# Allegro board AX7103-2021-0629.brd
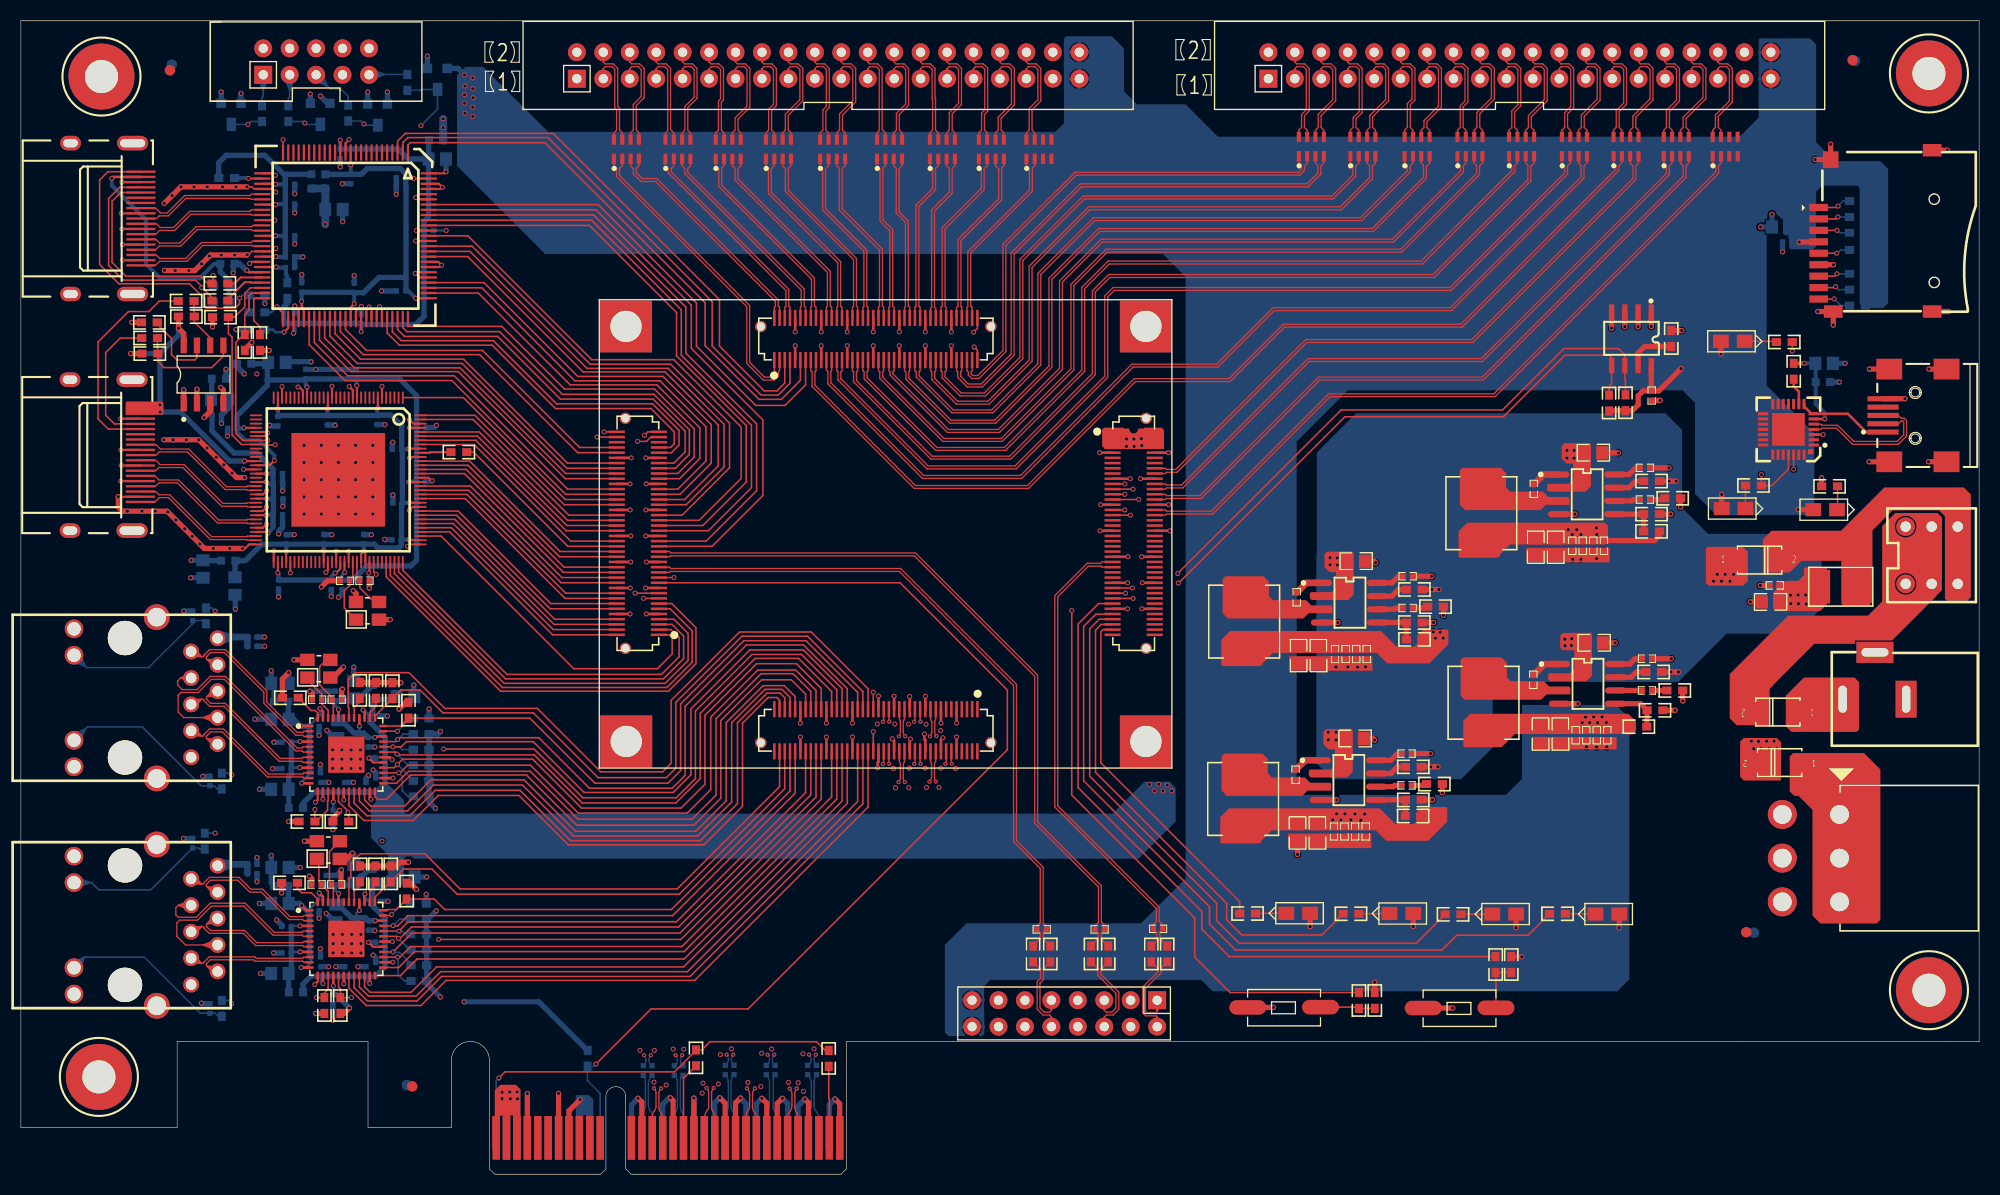
[diagram p0: board, top side]
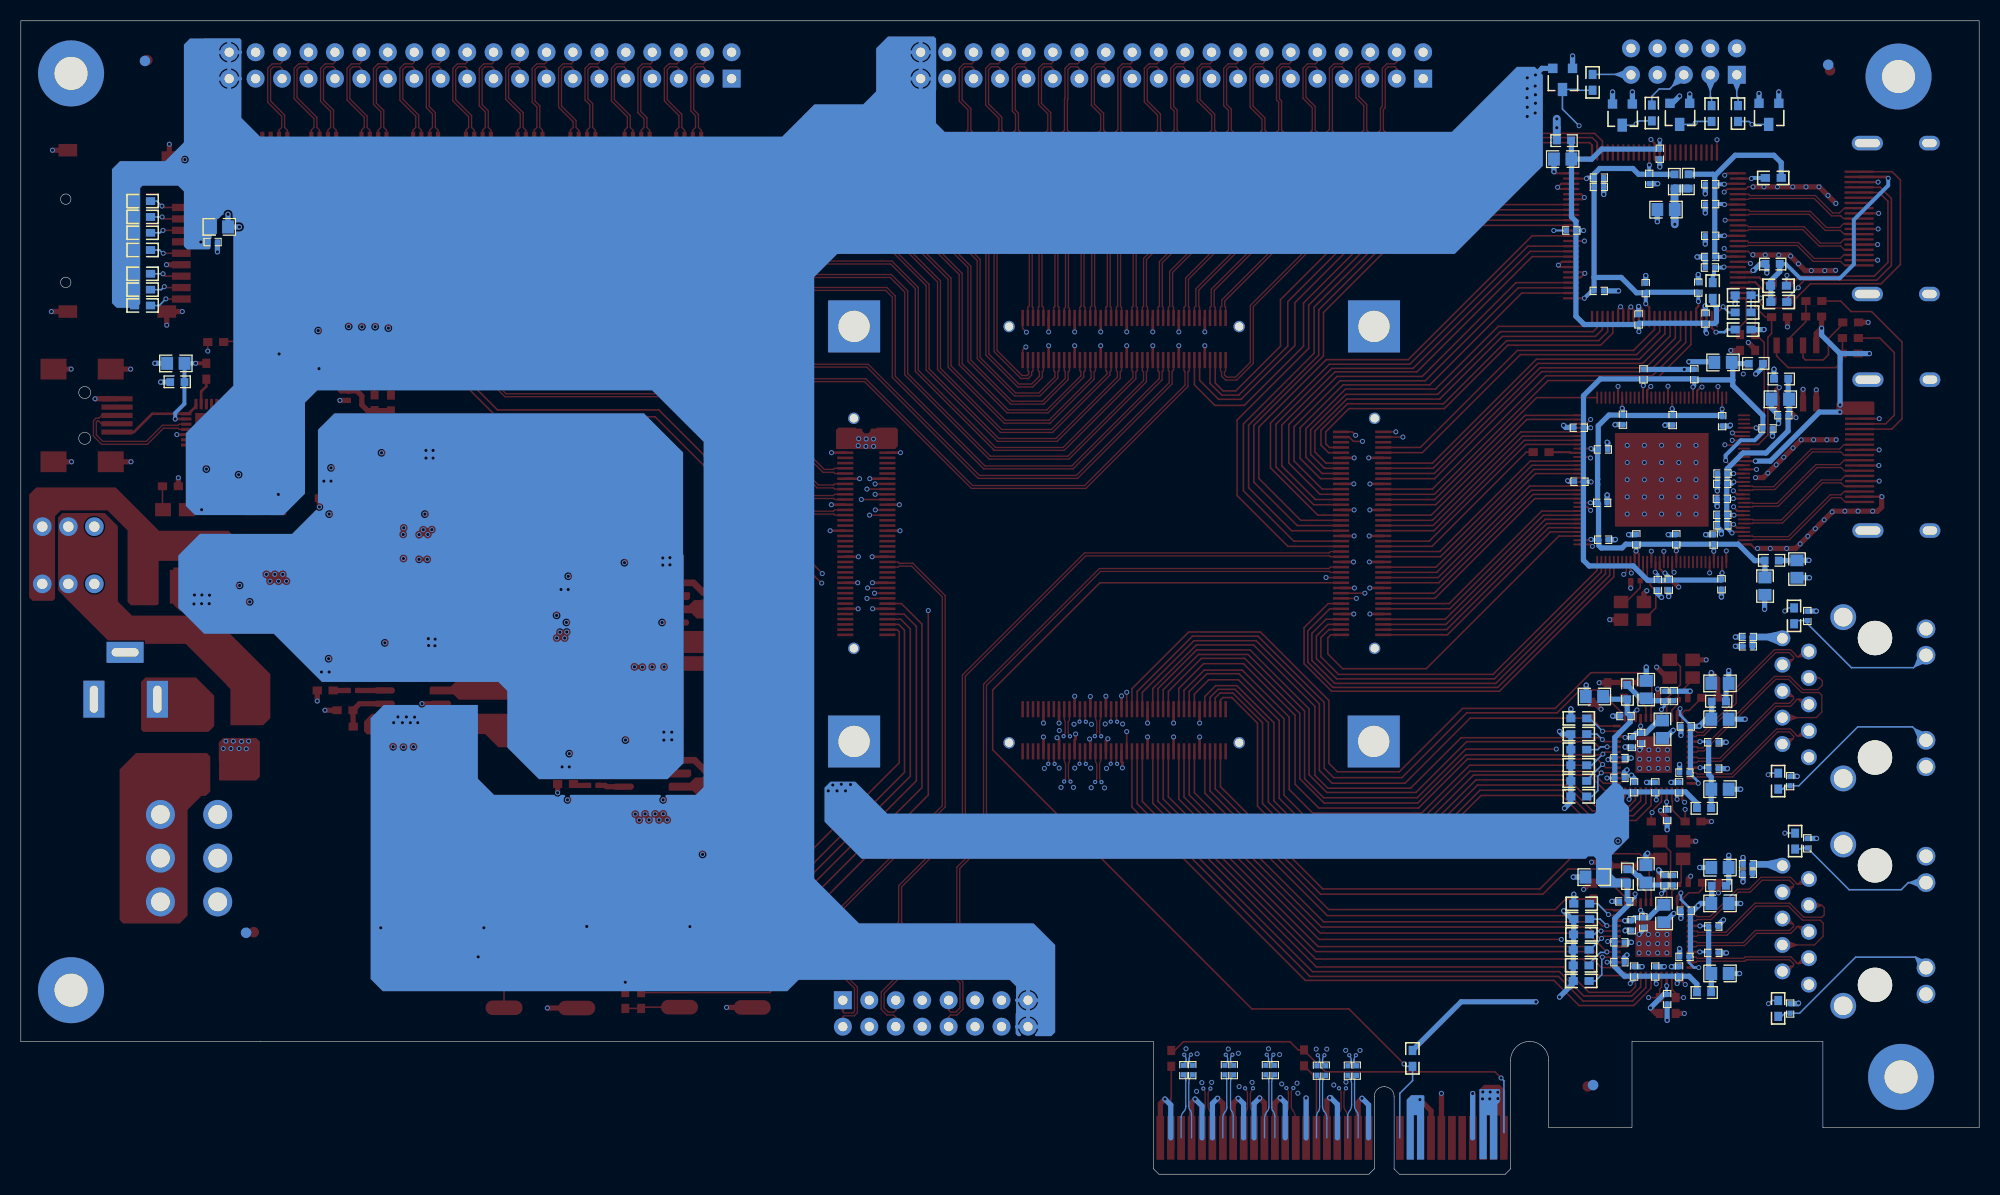
[diagram p1: board, bottom side, seen from below]

Outline 188.1 x 110.82 mm; copper layers: TOP, SGND, IN1, IN2, SGND1, BOTTOM. Coordinates in mm from the lower left corner of the outline.
Outline path: circle c181.96,75.1 r0.58 ; circle c181.96,70.7 r0.58 ; circle c183.78,93.68 r0.5 ; circle c183.78,85.68 r0.5 ; 0,110.82 0,4.5 15.01,4.5 15.01,12.75 33.35,12.75 33.35,4.5 41.35,4.5 41.35,10.92 arc(41.89,12.22) 43.18,12.75 arc(44.47,12.22) 45.01,10.92 45.01,0.51 45.52,0 55.69,0 56.2,0.51 56.2,7.47 arc(56.47,8.13) 57.14,8.41 57.16,8.41 arc(57.83,8.13) 58.1,7.47 58.1,0.51 58.61,0 78.79,0 79.3,0.51 79.3,12.73 188.1,12.73 188.1,110.82 0,110.82

## Design rules (mm)
net group EX_IO1_2P: nets EX_IO1_2N EX_IO1_2P
net group EX_IO1_4P: nets EX_IO1_4N EX_IO1_4P
net group EX_IO1_13P: nets EX_IO1_13N EX_IO1_13P
net group EX_IO1_14P: nets EX_IO1_14N EX_IO1_14P
net group EX_IO2_15N: nets EX_IO2_15N IO2_15N
net group EX_IO2_15P: nets EX_IO2_15P IO2_15P
net group EX_IO2_16N: nets EX_IO2_16N IO2_16N
net group EX_IO2_16P: nets EX_IO2_16P IO2_16P
net group IO1_4N: nets IO1_4N IO1_4P
net group IO1_13P: nets IO1_13N IO1_13P
net group IO1_14P: nets IO1_14N IO1_14P
net group N16786323: nets N16786264 N16786323
net group PCIE_CLK_N: nets N17087016 PCIE_CLK_N
net group PCIE_CLK_P: nets N17087018 PCIE_CLK_P
net group PCIE_TX0_N: nets N17086969 PCIE_TX0_N
net group PCIE_TX0_P: nets N17086971 PCIE_TX0_P
net group PCIE_TX1_N: nets N17086973 PCIE_TX1_N
net group PCIE_TX1_P: nets N17086975 PCIE_TX1_P
net group PCIE_TX2_N: nets N17086977 PCIE_TX2_N
net group PCIE_TX2_P: nets N17086979 PCIE_TX2_P
net group PCIE_TX3_N: nets N17086981 PCIE_TX3_N
net group PCIE_TX3_P: nets N17086983 PCIE_TX3_P
net group PHY_MDI0_N: nets PHY1_MDI0_P PHY2_MDI0_P
net group HDMI: nets RX_0N RX_0P RX_1N RX_1P RX_2N RX_2P RX_CN RX_CP TX_0N TX_0P TX_1N TX_1P TX_2N TX_2P TX_CN TX_CP
net group J11-DIFF: nets EX_IO1_1N EX_IO1_1P EX_IO1_3N EX_IO1_3P EX_IO1_5N EX_IO1_5P EX_IO1_6N EX_IO1_6P EX_IO1_7N EX_IO1_7P EX_IO1_8N EX_IO1_8P EX_IO1_9N EX_IO1_9P EX_IO1_10N EX_IO1_10P EX_IO1_11N EX_IO1_11P EX_IO1_12N EX_IO1_12P EX_IO1_15N EX_IO1_15P EX_IO1_16N EX_IO1_16P EX_IO1_17N EX_IO1_17P IO1_1N IO1_1P IO1_2N IO1_2P IO1_3N IO1_3P IO1_5N IO1_5P IO1_6N IO1_6P IO1_7N IO1_7P IO1_8N IO1_8P IO1_9N IO1_9P IO1_10N IO1_10P IO1_11N IO1_11P IO1_12N IO1_12P IO1_15N IO1_15P IO1_16N IO1_16P IO1_17N IO1_17P
net group J13-DIFF: nets EX_IO2_1N EX_IO2_1P EX_IO2_2N EX_IO2_2P EX_IO2_3N EX_IO2_3P EX_IO2_4N EX_IO2_4P EX_IO2_5N EX_IO2_5P EX_IO2_6N EX_IO2_6P EX_IO2_7N EX_IO2_7P EX_IO2_8N EX_IO2_8P EX_IO2_9N EX_IO2_9P EX_IO2_10N EX_IO2_10P EX_IO2_11N EX_IO2_11P EX_IO2_12N EX_IO2_12P EX_IO2_13N EX_IO2_13P EX_IO2_14N EX_IO2_14P EX_IO2_17N EX_IO2_17P IO2_1N IO2_1P IO2_2N IO2_2P IO2_3N IO2_3P IO2_4N IO2_4P IO2_5N IO2_5P IO2_6N IO2_6P IO2_7N IO2_7P IO2_8N IO2_8P IO2_9N IO2_9P IO2_10N IO2_10P IO2_11N IO2_11P IO2_12N IO2_12P IO2_13N IO2_13P IO2_14N IO2_14P IO2_17N IO2_17P
net group P1-DIFF: nets PCIE_RX0_N PCIE_RX0_P PCIE_RX1_N PCIE_RX1_P PCIE_RX2_N PCIE_RX2_P PCIE_RX3_N PCIE_RX3_P
net group PHY_MDI: nets PHY1_MDI0_N PHY1_MDI1_N PHY1_MDI1_P PHY1_MDI2_N PHY1_MDI2_P PHY1_MDI3_N PHY1_MDI3_P PHY2_MDI0_N PHY2_MDI1_N PHY2_MDI1_P PHY2_MDI2_N PHY2_MDI2_P PHY2_MDI3_N PHY2_MDI3_P
net group XADC-DIFF: nets XADC_AD0N XADC_AD0N_C XADC_AD0P XADC_AD0P_C XADC_AD9N XADC_AD9N_C XADC_AD9P XADC_AD9P_C XADC_VN XADC_VN_C XADC_VP XADC_VP_C

## Placement (name value [footprint] x y rotation side)
C61  10uF  [C0805]  40.01 97.54 0 bottom
C62  0.1uF  [C0402]  32.71 82.13 90 bottom
C63  0.1uF  [C0402]  30.68 98.03 270 bottom
C64  0.1uF  [C0402]  26.29 82.22 90 bottom
C65  0.1uF  [C0402]  26.98 85.19 90 bottom
C66  0.1uF  [C0402]  31.69 95.62 270 bottom
C67  0.1uF  [C0402]  32.02 85.14 90 bottom
C68  0.1uF  [C0402]  36.52 94.86 180 bottom
C69  0.1uF  [C0402]  36.52 95.75 180 bottom
C70  0.1uF  [C0402]  36.53 84.86 180 bottom
C71  0.1uF  [C0402]  25.85 87.11 180 bottom
C72  0.1uF  [C0402]  25.85 95.11 0 bottom
C73  0.1uF  [C0402]  25.85 88.13 0 bottom
C74  0.1uF  [C0402]  25.85 90.16 0 bottom
C75  0.1uF  [C0402]  25.85 93.21 0 bottom
C76  10uF  [C0805]  30.07 92.68 0 bottom
C77  0.1uF  [C0402]  39.19 90.67 0 bottom
C78  0.1uF  [C0402]  156.64 74.8 270 top
C79  10uF  [C0805]  169.04 91.01 180 bottom
C80  0.1uF  [C0402]  169.67 89.56 180 bottom
C81  1000pF  [C0402]  109.22 23.57 180 top
C82  1000pF  [C0402]  98.04 23.52 180 top
C84  1000pF  [C0402]  103.63 23.52 0 top
C109  0.1uF  [C0402]  62.76 9.96 90 bottom
C110  0.1uF  [C0402]  63.6 9.96 90 bottom
C111  0.1uF  [C0402]  59.79 9.96 90 bottom
C112  0.1uF  [C0402]  60.63 9.96 90 bottom
C113  0.1uF  [C0402]  72.44 10.01 90 bottom
C114  0.1uF  [C0402]  71.6 10.01 90 bottom
C115  0.1uF  [C0402]  68.5 10.01 90 bottom
C116  0.1uF  [C0402]  67.67 10.01 90 bottom
C129  1uF  [C0603]  173.07 76.11 0 bottom
C130  10uF  [C0805]  173.21 77.91 0 bottom
C133  10uF/25V  [C0805]  168.07 54.99 180 top
C134  0.1uF/25V  [C0402]  168.45 56.57 180 top
C135  0.01uF  [C0402]  145.33 65.83 270 top
C136  10uF/25V  [C0805]  151.04 69.31 0 top
C137  0.1uF  [C0402]  156 67.86 0 top
C138  10uF  [C0805]  145.51 60.24 270 top
C139  10uF  [C0805]  147.41 60.24 270 top
C140  0.1uF  [C0402]  152.06 60.37 270 top
C141  0.1uF  [C0402]  151.04 60.37 270 top
C142  0.1uF  [C0402]  150.03 60.37 270 top
C143  0.1uF  [C0402]  149.01 60.37 270 top
C144  33nF  [C0402]  156 64.81 0 top
C145  0.01uF  [C0402]  145.28 47.49 270 top
C146  10uF/25V  [C0805]  151.12 51.05 0 top
C147  10uF  [C0805]  145.96 42.29 270 top
C148  10uF  [C0805]  147.87 42.29 270 top
C149  0.1uF  [C0402]  152.39 42.16 270 top
C150  0.1uF  [C0402]  151.37 42.16 270 top
C151  0.1uF  [C0402]  150.36 42.16 270 top
C152  0.1uF  [C0402]  149.34 42.16 270 top
C153  0.1uF  [C0402]  156.2 49.52 0 top
C154  33nF  [C0402]  156.2 46.48 0 top
C155  0.1uF  [C0402]  76.43 10.01 90 bottom
C156  0.1uF  [C0402]  75.59 10.01 90 bottom
C157  0.1uF  [C0402]  18.82 72.93 0 bottom
C158  0.1uF  [C0402]  24.7 66.32 0 bottom
C159  0.1uF  [C0402]  24.68 63.35 0 bottom
C160  0.1uF  [C0402]  24.68 62.35 0 bottom
C161  0.1uF  [C0402]  24.67 67.31 0 bottom
C162  0.1uF  [C0402]  24.73 64.88 0 bottom
C163  0.1uF  [C0402]  25.5 60.99 90 bottom
C164  0.1uF  [C0402]  36.11 60.96 180 bottom
C165  0.1uF  [C0402]  29.44 72.44 270 bottom
C166  0.1uF  [C0402]  32.93 61.01 90 bottom
C167  0.1uF  [C0402]  36.13 69.63 180 bottom
C168  0.1uF  [C0402]  36.2 64.5 180 bottom
C169  0.1uF  [C0402]  34.21 72.48 270 bottom
C170  0.1uF  [C0402]  24.69 72.34 270 bottom
C171  0.1uF  [C0402]  29.1 61.01 90 bottom
C172  0.1uF  [C0402]  38.47 71.72 0 bottom
C173  0.1uF  [C0402]  29.82 56.63 270 bottom
C174  0.1uF  [C0402]  27.37 76.87 90 bottom
C175  0.1uF  [C0402]  24.75 56.67 270 bottom
C176  0.1uF  [C0402]  32.25 76.86 90 bottom
C177  0.1uF  [C0402]  30.86 56.6 270 bottom
C178  0.1uF  [C0402]  38.4 66.54 0 bottom
C179  0.1uF  [C0402]  20.32 71.65 180 bottom
C180  18pF  [C0402]  33.02 57.02 0 top
C181  18pF  [C0402]  31.13 57.01 180 top
C182  10uF  [C0805]  17.5 58.14 270 bottom
C183  10uF  [C0805]  19.1 74.46 0 bottom
C184  10uF  [C0805]  24.6 78 0 bottom
C185  10uF  [C0805]  20.57 56.5 270 bottom
C186  18pF  [C0402]  30.35 45.59 0 top
C187  18pF  [C0402]  28.45 45.59 180 top
C188  0.1uF  [C0402]  18.16 37.77 90 bottom
C189  0.1uF  [C0402]  16.51 53.64 90 bottom
C190  0.1uF  [C0402]  22.23 50.72 0 bottom
C191  0.1uF  [C0402]  22.23 51.61 0 bottom
C192  22uF  [C0805]  30.43 42.75 270 bottom
C193  0.1uF  [C0402]  32.46 41.91 270 bottom
C194  0.1uF  [C0402]  33.35 41.5 270 bottom
C195  0.1uF  [C0402]  29.97 34.52 270 bottom
C196  0.1uF  [C0402]  18.16 15.93 90 bottom
C197  22uF  [C0805]  24.89 47.17 0 bottom
C198  22uF  [C0805]  24.89 43.71 180 bottom
C199  0.1uF  [C0402]  22.23 28.88 0 bottom
C200  0.1uF  [C0402]  16.51 31.8 90 bottom
C201  0.1uF  [C0402]  22.23 29.77 0 bottom
C202  22uF  [C0805]  24.89 29.46 0 bottom
C203  22uF  [C0805]  24.89 26.01 180 bottom
C204  22uF  [C0805]  30.28 25.04 270 bottom
C205  0.1uF  [C0402]  29.97 16.81 270 bottom
C206  0.1uF  [C0402]  32.26 24.18 270 bottom
C207  0.1uF  [C0402]  28.32 38.58 0 bottom
C208  0.1uF  [C0402]  28.19 43.03 0 bottom
C209  0.1uF  [C0402]  28.32 20.88 0 bottom
C210  22uF  [C0805]  36.96 45.9 0 bottom
C211  22uF  [C0805]  24.89 36.98 180 bottom
C213  22uF  [C0805]  31.98 46.56 90 bottom
C214  0.1uF  [C0402]  28.19 25.32 0 bottom
C215  22uF  [C0805]  24.89 19.28 180 bottom
C216  22uF  [C0805]  32 28.85 90 bottom
C217  0.1uF  [C0402]  33.38 23.9 270 bottom
C218  22uF  [C0805]  36.98 28.55 0 bottom
C219  18pF  [C0402]  30.3 27.84 0 top
C220  18pF  [C0402]  28.4 27.84 180 top
C223  10uF  [C0805]  122.72 49.83 270 top
C224  10uF  [C0805]  124.63 49.83 270 top
C225  10uF/25V  [C0805]  128.26 58.9 0 top
C226  0.1uF  [C0402]  127.24 49.96 270 top
C227  0.1uF  [C0402]  126.23 49.96 270 top
C228  0.1uF  [C0402]  128.26 49.96 270 top
C229  0.1uF  [C0402]  129.27 49.96 270 top
C230  0.01uF  [C0402]  122.54 55.42 270 top
C231  0.1uF  [C0402]  133.21 57.45 0 top
C232  33nF  [C0402]  133.21 54.4 0 top
C233  10uF  [C0805]  122.62 32.79 270 top
C234  10uF  [C0805]  124.53 32.79 270 top
C235  10uF/25V  [C0805]  128.16 41.85 0 top
C236  0.1uF  [C0402]  128.16 32.91 270 top
C237  0.1uF  [C0402]  129.17 32.91 270 top
C238  0.1uF  [C0402]  127.14 32.91 270 top
C239  0.1uF  [C0402]  126.13 32.91 270 top
C240  0.1uF  [C0402]  133.11 40.41 0 top
C241  0.01uF  [C0402]  122.44 38.37 270 top
C242  0.1uF  [C0402]  31.11 37.19 90 bottom
C243  33nF  [C0402]  133.11 37.36 0 top
C244  0.1uF  [C0402]  28.83 19.48 90 bottom
C245  0.1uF  [C0402]  25.53 38.96 180 bottom
C246  0.1uF  [C0402]  28.83 37.19 90 bottom
C247  0.1uF  [C0402]  33.15 37.19 90 bottom
C248  0.1uF  [C0402]  33.99 44.02 0 bottom
C249  0.1uF  [C0402]  34.54 39.98 180 bottom
C250  0.1uF  [C0402]  34.54 38.07 180 bottom
C251  0.1uF  [C0402]  25.53 41.5 180 bottom
C252  0.01uF  [C0402]  29.34 45.95 90 bottom
C253  0.1uF  [C0402]  30.23 45.95 90 bottom
C259  0.1uF  [C0402]  25.53 23.8 180 bottom
C260  0.1uF  [C0402]  25.53 21.26 180 bottom
C261  0.1uF  [C0402]  30.23 28.24 90 bottom
C262  0.01uF  [C0402]  29.34 28.24 90 bottom
C263  0.1uF  [C0402]  31.11 19.48 90 bottom
C264  0.1uF  [C0402]  33.15 19.48 90 bottom
C265  0.1uF  [C0402]  34.54 22.28 180 bottom
C266  0.1uF  [C0402]  34.54 20.37 180 bottom
C267  0.1uF  [C0402]  34.09 26.21 0 bottom
CN1  AJ243-3-3C  [CN1-DCJACK]  181.08 45.64 90 top
CON1  -  [AXK680337YG]  106.89 61.57 270 top
CON2  -  [AXK680337YG]  82.13 80.24 0 top
CON3  -  [AXK680337YG]  59.27 61.57 90 top
CON4  -  [AXK680337YG]  82.13 42.65 180 top
D1  BAT54S  [SOT23]  19.24 102.89 0 bottom
D2  BAT54S  [SOT23]  27.8 102.89 0 bottom
D3  BAT54S  [SOT23]  33.31 102.82 0 bottom
D4  BAT54S  [SOT23]  39.06 106.25 0 bottom
D23  B340A  [DO-214AC]  168.76 44.4 180 top
D24  B340A  [DO-214AC]  168.94 39.55 180 top
D25  B340A  [DO-214AC]  167 59 0 top
F1  2A  [FUSE_1812]  174.8 56.44 180 top
F2  SMD0603P014TF-33  [L0603]  19.84 87.47 180 bottom
J3  HR911130A  [GE_RJ45]  10.01 51.51 180 top
J4  HR911130A  [GE_RJ45]  10.01 29.67 180 top
J7  Micro SD  [MICRO_SD]  172.68 92.88 90 top
J9  HEADER 5X2  [JTAG-10]  23.28 105.63 0 top
J10  MINI_USB  [MINIUSBB]  178.86 72.9 180 top
J11  HEADER 20x2/M  [IDC-40J]  143.96 106.53 0 top
J12  HDMI OUT  [HDMI_A_TYPE]  12.69 99.32 0 top
J13  HEADER 20x2/M  [IDC-40J]  77.54 106.53 0 top
J14  39-30-1060  [CON_MOL_5569_6P]  174.69 34.56 0 top
J15  HDMI IN  [HDMI_A_TYPE]  12.64 76.59 0 top
J18  CON16A  [IDC16-DTM1-A]  100.2 15.39 180 top
KEY1  Button  [KEY735SO]  124.83 16.05 180 top
KEY2  Button  [KEY735SO]  141.69 15.99 180 top
L3  120OHM@100Mhz  [L0603]  25.01 45.42 0 bottom
L4  120OHM@100Mhz  [L0603]  26.43 35.18 180 bottom
L5  120OHM@100Mhz  [L0603]  33.81 46.32 90 bottom
L6  120OHM@100Mhz  [L0603]  25.01 27.71 0 bottom
L7  BEAD  [L0603]  39.88 99.33 180 bottom
L8  BEAD  [L0603]  29.25 95.38 270 bottom
L9  120OHM@100Mhz  [L0603]  26.43 17.48 180 bottom
L10  120OHM@100Mhz  [L0603]  33.81 28.61 90 bottom
L13  10uH  [SMTDR75-100M]  140.29 63.51 270 top
L14  10uH  [SMTDR75-100M]  140.49 45.3 270 top
L15  BEAD  [L0603]  27.91 95.39 270 bottom
L16  BEAD  [L0603]  21.45 77.88 0 bottom
L17  BEAD  [L0603]  19.93 58.95 0 bottom
L18  BEAD  [L0603]  19.02 76.43 180 bottom
L19  10uH  [SMTDR75-100M]  117.5 53.09 270 top
L20  10uH  [SMTDR75-100M]  117.4 36.05 270 top
LED1  RED  [LEDSO]  121.55 25.07 0 top
LED2  RED  [LEDSO]  131.46 25.04 0 top
LED3  RED  [LEDSO]  165.58 80.02 180 top
LED4  RED  [LEDSO]  165.65 63.95 180 top
LED5  RED  [LEDSO]  174.44 63.85 180 top
LED6  RED  [LEDSO]  141.34 24.99 0 top
LED7  RED  [LEDSO]  151.24 24.99 0 top
NOREF  -  [unnamed]  58.15 41.58 0 top
NOREF#2  -  [unnamed]  108.06 41.58 0 top
NOREF#3  -  [#2]  302.27 53.99 0 top
NOREF#4  -  [#2]  0.15 4.5 90 top
NOREF#5  -  [#2]  0.1 108.56 0 top
NOREF#6  -  [unnamed]  58.13 81.46 0 top
NOREF#7  -  [unnamed]  108.06 81.46 0 top
NOREF#8  -  [unnamed#2]  14.32 106.06 0 top
NOREF#9  -  [unnamed#2]  175.95 107.04 0 top
NOREF#10  -  [unnamed#2]  37.59 8.43 0 top
NOREF#11  -  [unnamed#2]  165.73 23.25 0 top
NOREF#12  -  [unnamed#2]  176.17 106.96 180 bottom
NOREF#13  -  [unnamed#2]  14.5 106.6 180 bottom
NOREF#14  -  [unnamed#2]  37.08 8.56 180 bottom
NOREF#15  -  [unnamed#2]  166.46 23.2 180 bottom
P1  PCIeX4  [PCIE_4LANE_EDGE]  45.65 3.49 0 top
R51  0R  [R0603]  158.52 80.29 90 top
R52  0R  [R0603]  25.59 84.9 270 bottom
R53  33R  [R0603]  19.12 85.58 180 top
R54  33R  [R0603]  19.12 83.93 180 top
R55  10K  [R0603]  22.68 81.15 180 bottom
R56  33R  [R0603]  22.68 82.8 180 bottom
R57  10K  [R0603]  22.97 79.91 270 top
R58  698R  [R0603]  19.78 95.72 180 bottom
R59  10K  [R0603]  22.68 84.44 0 bottom
R60  10K  [R0603]  19.27 85.36 0 bottom
R61  10K  [R0603]  19.25 83.8 0 bottom
R62  4.7K  [R0603]  19.18 82.34 180 top
R63  4.7K  [R0603]  21.52 79.91 270 top
R64  4.7K  [R0603]  154.12 74.12 90 top
R65  4.7K  [R0603]  152.55 74.09 90 top
R66  330R  [R0603]  19.3 37.77 270 bottom
R67  1.5K  [R0603]  37.23 44.58 90 top
R68  1.5K  [R0603]  35.68 46.46 90 top
R69  4.7K  [R0603]  34.12 46.48 270 top
R70  12.1K 1%  [R0603]  25.88 45.77 0 top
R71  330R  [R0603]  17.78 53.64 270 bottom
R72  4.7K  [R0603]  32.56 46.48 90 top
R73  4.7K  [R0603]  38.46 36.29 0 bottom
R74  4.7K  [R0603]  38.46 37.79 0 bottom
R75  4.7K  [R0603]  38.46 40.79 0 bottom
R76  4.7K  [R0603]  38.46 39.29 0 bottom
R77  4.7K  [R0603]  30.73 33.88 180 top
R78  1K  [R0603]  38.46 43.79 180 bottom
R79  1K  [R0603]  27.48 33.89 0 top
R80  4.7K  [R0603]  38.46 42.29 0 bottom
R81  1.5K  [R0603]  35.53 28.85 90 top
R82  4.7K  [R0603]  34.06 28.85 270 top
R83  12.1K 1%  [R0603]  25.81 27.99 0 top
R84  330R  [R0603]  19.3 15.93 270 bottom
R85  330R  [R0603]  17.67 32 270 bottom
R86  4.7K  [R0603]  32.58 28.85 90 top
R87  4.7K  [R0603]  38.23 20.06 0 bottom
R88  4.7K  [R0603]  38.23 18.56 0 bottom
R89  4.7K  [R0603]  38.23 21.56 0 bottom
R90  4.7K  [R0603]  38.2 23.03 0 bottom
R91  4.7K  [R0603]  30.69 16.21 270 top
R92  1K  [R0603]  38.18 25.99 180 bottom
R93  1K  [R0603]  29.16 16.21 90 top
R94  4.7K  [R0603]  38.18 24.51 0 bottom
R95  1.5K  [R0603]  37.06 27.2 90 top
R101  0R  [R0603]  64.85 11.18 270 top
R102  0R  [R0603]  77.6 11.13 270 top
R103  4.7K  [R0603]  54.43 11.13 270 bottom
R104  10K  [R0603]  176.4 83.46 0 bottom
R105  10K  [R0603]  176.4 86.51 0 bottom
R106  10K  [R0603]  176.4 91.97 0 bottom
R107  10K  [R0603]  176.4 93.49 0 bottom
R108  33R  [R0603]  15.88 83.89 180 top
R109  33R  [R0603]  12.37 80.34 180 top
R110  4.7K  [R0603]  12.4 78.85 0 top
R111  10K  [R0603]  176.4 90.45 0 bottom
R112  10K  [R0603]  176.4 84.98 0 bottom
R113  10K  [R0603]  176.4 88.79 0 bottom
R121  33R  [R0603]  23.16 101.9 270 bottom
R122  33R  [R0603]  25.7 101.9 270 bottom
R123  33R  [R0603]  31.44 101.96 270 bottom
R124  33R  [R0603]  37.13 104.9 270 bottom
R125  10K  [R0603]  170.28 77.15 90 top
R126  510R  [R0603]  169.38 79.95 180 top
R127  510R  [R0603]  166.42 66.17 180 top
R131  10K  [R0603]  130.04 16.69 90 top
R133  1K  [R0603]  128.52 16.69 90 top
R134  220R  [R0603]  127.76 25.02 0 top
R135  220R  [R0603]  117.83 25.05 0 top
R136  220R  [R0603]  173.73 66.09 0 top
R137  33R  [R0603]  42.08 69.38 180 top
R138  47K  [R0603]  156.63 66.59 180 top
R139  47K  [R0603]  156.63 61.76 180 top
R140  10K/1%  [R0603]  156.63 63.42 0 top
R141  2.2K  [R0603]  158.66 64.95 0 top
R142  47K  [R0603]  156.83 48.25 180 top
R143  26.1K/1%  [R0603]  155.41 43 0 top
R144  10K/1%  [R0603]  156.96 44.57 0 top
R145  2.2K  [R0603]  158.87 46.48 0 top
R146  4.7K  [R0603]  15.9 82.4 0 top
R147  10K  [R0603]  12.34 81.84 0 top
R148  49.9  [R0603]  110.11 21.16 90 top
R149  49.9  [R0603]  108.58 21.16 90 top
R150  49.9  [R0603]  98.88 21.16 90 top
R151  49.9  [R0603]  97.23 21.16 90 top
R152  220R  [R0603]  137.57 24.97 0 top
R153  220R  [R0603]  147.6 25.02 0 top
R154  49.9  [R0603]  102.79 21.16 90 top
R155  49.9  [R0603]  104.44 21.16 90 top
R156  2.2K  [R0603]  135.88 54.53 0 top
R157  47K  [R0603]  133.85 56.18 180 top
R158  1K  [R0603]  141.65 20.14 90 top
R159  10K  [R0603]  143.15 20.14 90 top
R160  9.53K/1%  [R0603]  133.86 51.38 180 top
R161  10K/1%  [R0603]  133.85 53.01 0 top
R162  2.2K  [R0603]  135.78 37.49 0 top
R163  47K  [R0603]  133.75 39.13 180 top
R164  3.09K/1%  [R0603]  133.73 34.41 180 top
R165  10K/1%  [R0603]  133.75 35.96 0 top
RN1  33R  [RN-8P]  122.75 97.8 90 top
RN2  33R  [RN-8P]  127.71 97.8 90 top
RN3  33R  [RN-8P]  132.91 97.8 90 top
RN4  33R  [RN-8P]  137.99 97.8 90 top
RN5  33R  [RN-8P]  142.95 97.8 90 top
RN6  33R  [RN-8P]  148.03 97.8 90 top
RN7  33R  [RN-8P]  152.98 97.8 90 top
RN8  33R  [RN-8P]  157.8 97.8 90 top
RN9  33R  [RN-8P]  162.5 97.8 90 top
RN10  33R  [RN-8P]  56.97 97.55 90 top
RN11  33R  [RN-8P]  66.75 97.55 90 top
RN12  33R  [RN-8P]  71.57 97.55 90 top
RN13  33R  [RN-8P]  61.92 97.55 90 top
RN14  33R  [RN-8P]  76.78 97.55 90 top
RN15  33R  [RN-8P]  82.24 97.55 90 top
RN16  33R  [RN-8P]  87.32 97.55 90 top
RN17  33R  [RN-8P]  92.02 97.55 90 top
RN18  33R  [RN-8P]  96.59 97.55 90 top
S1  Screw_2.9  [MH_250H125]  183.27 17.68 0 top
S2  Screw_2.9  [MH_250H125]  183.27 105.76 0 top
S3  Screw_2.9  [MH_250H125]  7.75 105.46 0 top
S4  Screw_2.9  [MH_250H125]  7.5 9.35 0 top
SW1  Power Switch  [POWER_SW]  183.54 62.22 90 top
U2  KSZ9031RNX  [QFN_7X7]  31.27 40.31 270 top
U3  KSZ9031RNX  [QFN_7X7]  31.27 22.61 270 top
U5  CP2102-GM  [QFN-28]  169.78 71.56 180 top
U6  MP1482DS  [MP1482-SOIC8]  150.41 65.32 270 top
U7  MP1482DS  [MP1482-SOIC8]  150.48 47.11 270 top
U8  MP1482DS  [MP1482-SOIC8]  127.62 54.91 270 top
U9  24LC04  [8S1_SOIC8]  154.7 80.27 0 top
U10  SiI9134  [QFP-100]  31.19 90.16 270 top
U11  MP1482DS  [MP1482-SOIC8]  127.52 37.87 270 top
U13  SiI9013/9011  [QFP-128HPAD]  30.49 66.71 270 top
U14  24C02  [SO8]  15.65 74.04 90 top
Y2  25MHZ  [SX2-1205]  28.63 48.56 0 top
Y3  25MHZ  [SX2-1205]  29.54 31.14 0 top
Y4  27MHZ  [SX2-1205]  33.3 54.13 0 top

## Library data of the parts
C61 C76 C78-C82 C84 C129 C130 C133 C135-C139 C144-C148 C153 C154 C180-C187 C192-C195 C197 C198 C202-C211 C213-C220 C223-C225 C230-C235 C240-C253 C259-C267 = CAP NP
C62-C75 C77 C134 C140-C143 C149-C152 C157-C179 C226-C229 C236-C239 = C_1
C109-C116 C155 C156 = CAP NP: signal model: C0402
C188-C191 C196 C199-C201 = CAP_3
CN1 = AJ243_0
CON1 = CON40X2_0_0
CON2 = CON40X2_0_1
CON3 = CON40X2_0_2
CON4 = CON40X2_0_3
D1-D4 = SBL1645CT/TO_0
D23-D25 = BZX84C33/SOT_0
F1 = FUSE
F2 = FUSE/SM
J3 J4 = GE_RJ45_2
J7 = Micro SD_2
J9 = HEADER 5X2
J10 = USB_B_3
J11 J13 = HEADER 20x2/M
J12 J15 = HDMI Connector_0
J14 = 39-30-1060_2
J18 = CON16A
KEY1 KEY2 = Button_0
L3-L10 L13-L15 L19 L20 = INDUCTOR
L16-L18 = INDUCTOR_0
LED1-LED7 = LN211WP
P1 = PCIex4
R51 R65 R67-R70 R72-R83 R86-R95 R104-R107 R111-R113 R121-R127 R131 R133-R136 R138-R145 R152 R153 R156-R165 = RESISTOR
R52-R63 = R_0
R64 = RESISTOR: signal model: R_GENERIC_R0402_33R_33R
R66 R71 R84 R85 = R_2
R101-R103 R108-R110 R137 R146-R151 R154 R155 = R
RN1-RN16 RN18 = RESARR_IS_4/SM
RN17 = RESARR_IS_4/SM: signal model: RESARR_IS_4/SM_RN-8P_33R_33R
S1-S4 = screw_0
SW1 = SENS59150-SPST_1
U2 U3 = KS8995M_4
U5 = CP2102_2
U6-U8 U11 = MP2305
U9 = ATSHA204_0
U10 = SiI9134_0
U13 = SiI9013/9011_5
U14 = M24CO2 PDIP8
Y2-Y4 = X3_0

## Footprints (pads in the part's own frame, mm; a bottom-side part is the same pattern mirrored in y, then rotated)
8S1_SOIC8
  rect 0.518x1.458 smd: 1(1.905,2.58) 2(0.635,2.58) 3(-0.635,2.58) 4(-1.905,2.58) 5(-1.905,-2.58) 6(-0.635,-2.58) 7(0.635,-2.58) 8(1.905,-2.58)
AXK680337YG
  rect 0.25x1.55 smd: 1(-9.75,-2.025) 2(-9.75,2.025) 3(-9.25,-2.025) 4(-9.25,2.025) 5(-8.75,-2.025) 6(-8.75,2.025) 7(-8.25,-2.025) 8(-8.25,2.025) 9(-7.75,-2.025) 10(-7.75,2.025) 11(-7.25,-2.025) 12(-7.25,2.025) 13(-6.75,-2.025) 14(-6.75,2.025) 15(-6.25,-2.025) 16(-6.25,2.025) 17(-5.75,-2.025) 18(-5.75,2.025) 19(-5.25,-2.025) 20(-5.25,2.025) 21(-4.75,-2.025) 22(-4.75,2.025) 23(-4.25,-2.025) 24(-4.25,2.025) 25(-3.75,-2.025) 26(-3.75,2.025) 27(-3.25,-2.025) 28(-3.25,2.025) 29(-2.75,-2.025) 30(-2.75,2.025) 31(-2.25,-2.025) 32(-2.25,2.025) 33(-1.75,-2.025) 34(-1.75,2.025) 35(-1.25,-2.025) 36(-1.25,2.025) 37(-0.75,-2.025) 38(-0.75,2.025) 39(-0.25,-2.025) 40(-0.25,2.025) 41(0.25,-2.025) 42(0.25,2.025) 43(0.75,-2.025) 44(0.75,2.025) 45(1.25,-2.025) 46(1.25,2.025) 47(1.75,-2.025) 48(1.75,2.025) 49(2.25,-2.025) 50(2.25,2.025) 51(2.75,-2.025) 52(2.75,2.025) 53(3.25,-2.025) 54(3.25,2.025) 55(3.75,-2.025) 56(3.75,2.025) 57(4.25,-2.025) 58(4.25,2.025) 59(4.75,-2.025) 60(4.75,2.025) 61(5.25,-2.025) 62(5.25,2.025) 63(5.75,-2.025) 64(5.75,2.025) 65(6.25,-2.025) 66(6.25,2.025) 67(6.75,-2.025) 68(6.75,2.025) 69(7.25,-2.025) 70(7.25,2.025) 71(7.75,-2.025) 72(7.75,2.025) 73(8.25,-2.025) 74(8.25,2.025) 75(8.75,-2.025) 76(8.75,2.025) 77(9.25,-2.025) 78(9.25,2.025) 79(9.75,-2.025) 80(9.75,2.025)
  round 1.1 hole 0.8: 81(-11.05,1.2) 82(11.05,1.2)
C0402
  rect 0.508x0.508 smd: 1(-0.457,0) 2(0.457,0)
C0603
  rect 0.762x0.762 smd: 1(-0.686,0) 2(0.686,0)
C0805
  rect 1.143x1.27 smd: 1(-0.838,0) 2(0.838,0)
CN1-DCJACK
  rect 3.556x2.032 hole 2.6x0.8: 1(0,0) 3(0,6.1)
  rect 2.032x3.556 hole 0.8x2.6: 2(4.5,2.997)
CON_MOL_5569_6P
  round 2.794 hole 1.803: 1(0,0) 2(0,-4.2) 3(0,-8.4) 4(-5.5,0) 5(-5.5,-4.2) 6(-5.5,-8.4)
DO-214AC
  rect 1.6x1.676 smd: 1(-1.99,0) 2(1.99,0)
FUSE_1812
  rect 1.829x3.251 smd: 1(-1.93,0) 2(1.93,0)
GE_RJ45
  round 3.3 hole 3.3 unplated: (0,11.48) (0,0)
  round 1.8 hole 1.3: 11(4.9,-0.885) 12(4.9,1.655) 13(4.9,9.825) 14(4.9,12.365)
  round 2.489 hole 1.8: 15(-3.05,-2.01) 16(-3.05,13.49)
  round 1.524 hole 1.016: P1(-8.89,0.025) P2(-6.35,1.295) P3(-8.89,2.565) P4(-6.35,3.835) P5(-8.89,5.105) P6(-6.35,6.375) P7(-8.89,7.645) P8(-6.35,8.915) P9(-8.89,10.185) P10(-6.35,11.455)
HDMI_A_TYPE
  rect 2.8x0.229 smd: 1(-1.15,-12) 2(-1.15,-11.5) 3(-1.15,-11) 4(-1.15,-10.5) 5(-1.15,-10) 6(-1.15,-9.5) 7(-1.15,-9) 8(-1.15,-8.5) 9(-1.15,-8) 10(-1.15,-7.5) 11(-1.15,-7) 12(-1.15,-6.5) 13(-1.15,-6) 14(-1.15,-5.5) 15(-1.15,-5) 16(-1.15,-4.5) 17(-1.15,-4) 18(-1.15,-3.5) 19(-1.15,-3)
  oval 3x1.4 hole 2.4x0.8: 20(-1.95,-14.75) 21(-1.95,-0.25)
  oval 2x1.4 hole 1.4x0.8: 22(-7.91,-14.75) 23(-7.91,-0.25)
IDC16-DTM1-A
  rect 1.727x1.727 hole 0.889: 1(-8.941,-1.321)
  round 1.727 hole 0.889: 2(-8.941,1.219) 3(-6.401,-1.321) 4(-6.401,1.219) 5(-3.861,-1.321) 6(-3.861,1.219) 7(-1.321,-1.321) 8(-1.321,1.219) 9(1.219,-1.321) 10(1.219,1.219) 11(3.759,-1.321) 12(3.759,1.219) 13(6.299,-1.321) 14(6.299,1.219) 15(8.839,-1.321) 16(8.839,1.219)
IDC-40J
  rect 1.727x1.727 hole 0.889: 1(-24.13,-1.27)
  round 1.727 hole 0.889: 2(-24.13,1.27) 3(-21.59,-1.27) 4(-21.59,1.27) 5(-19.05,-1.27) 6(-19.05,1.27) 7(-16.51,-1.27) 8(-16.51,1.27) 9(-13.97,-1.27) 10(-13.97,1.27) 11(-11.43,-1.27) 12(-11.43,1.27) 13(-8.89,-1.27) 14(-8.89,1.27) 15(-6.35,-1.27) 16(-6.35,1.27) 17(-3.81,-1.27) 18(-3.81,1.27) 19(-1.27,-1.27) 20(-1.27,1.27) 21(1.27,-1.27) 22(1.27,1.27) 23(3.81,-1.27) 24(3.81,1.27) 25(6.35,-1.27) 26(6.35,1.27) 27(8.89,-1.27) 28(8.89,1.27) 29(11.43,-1.27) 30(11.43,1.27) 31(13.97,-1.27) 32(13.97,1.27) 33(16.51,-1.27) 34(16.51,1.27) 35(19.05,-1.27) 36(19.05,1.27) 37(21.59,-1.27) 38(21.59,1.27) 39(24.13,-1.27) 40(24.13,1.27)
JTAG-10
  rect 1.73x1.73 hole 0.89: 1(0,0)
  round 1.73 hole 0.89: 2(0,2.54) 3(2.54,0) 4(2.54,2.54) 5(5.08,0) 6(5.08,2.54) 7(7.62,0) 8(7.62,2.54) 9(10.16,0) 10(10.16,2.54)
KEY735SO
  oval 3.556x1.4 smd: 1(0,0) 2(6.985,0.025)
L0603
  rect 0.762x0.762 smd: 1(-0.686,0) 2(0.686,0)
LEDSO
  rect 1.524x1.27 smd: 1(2.286,0) 2(0,0)
MH_250H125
  round 6.35 hole 3.175: 1(0,0)
MICRO_SD
  rect 0.7x1.8 smd: 1(0,0) 2(-1.1,0) 3(-2.2,0) 4(-3.3,0) 5(-4.4,0) 6(-5.5,0) 7(-6.6,0) 8(-7.7,0) 9(-8.8,0)
  rect 1.6x1.5 smd: 10(4.6,-1.15)
  rect 1.2x1.8 smd: 11(-10,-1.4) 12(-10,-10.9) 13(5.5,-10.9)
MINIUSBB
  rect 3x0.5 smd: 1(0,1.6) 2(0,0.8) 3(0,0) 4(0,-0.8) 5(0,-1.6)
  rect 2.5x2 smd: 6(-0.6,-4.45) 7(-6.1,-4.45) 8(-0.6,4.45) 9(-6.1,4.45)
MP1482-SOIC8
  oval 0.61x2.032 smd: 1(-1.905,-2.7) 2(-0.635,-2.7) 3(0.635,-2.7) 4(1.905,-2.7) 5(1.905,2.7) 6(0.635,2.7) 7(-0.635,2.7) 8(-1.905,2.7)
PCIE_4LANE_EDGE
  rect 0.711x3.2 smd: A1(0,0.495) B31(32,0.495)
  rect 0.711x4.191 smd: A2(1,0) A3(2,0) A4(3,0) A5(4,0) A6(5,0) A7(6,0) A8(7,0) A9(8,0) A10(9,0) A11(10,0) A12(13,0) A13(14,0) A14(15,0) A15(16,0) A16(17,0) A17(18,0) A18(19,0) A19(20,0) A20(21,0) A21(22,0) A22(23,0) A23(24,0) A24(25,0) A25(26,0) A26(27,0) A27(28,0) A28(29,0) A29(30,0) A30(31,0) A31(32,0) A32(33,0) B1(0,0) B2(1,0) B3(2,0) B4(3,0) B5(4,0) B6(5,0) B7(6,0) B8(7,0) B9(8,0) B10(9,0) B11(10,0) B12(13,0) B13(14,0) B14(15,0) B15(16,0) B16(17,0) B17(18,0) B18(19,0) B19(20,0) B20(21,0) B21(22,0) B22(23,0) B23(24,0) B24(25,0) B25(26,0) B26(27,0) B27(28,0) B28(29,0) B29(30,0) B30(31,0) B32(33,0)
POWER_SW
  round 1.8 hole 1: 1(-5.5,2.5) 2(-5.5,0) 3(-5.5,-2.5) 4(0,2.5) 5(0,0) 6(0,-2.5)
QFN-28
  rect 1x0.3 smd: 1(-2.43,1.5) 2(-2.43,1) 3(-2.43,0.5) 4(-2.43,0) 5(-2.43,-0.5) 6(-2.43,-1) 7(-2.43,-1.5) 15(2.43,-1.5) 16(2.43,-1) 17(2.43,-0.5) 18(2.43,0) 19(2.43,0.5) 20(2.43,1) 21(2.43,1.5)
  rect 0.3x1 smd: 8(-1.5,-2.43) 9(-1,-2.43) 10(-0.5,-2.43) 11(0,-2.43) 12(0.5,-2.43) 13(1,-2.43) 14(1.5,-2.43) 22(1.5,2.43) 23(1,2.43) 24(0.5,2.43) 25(0,2.43) 26(-0.5,2.43) 27(-1,2.43) 28(-1.5,2.43)
  rect 3.15x3.15 smd: 29(0,0)
  rect 0.508x0.508 smd: 30(-2.134,2.134)
QFN_7X7
  rect 0.25x0.754 smd: 1(-2.75,-3.527) 2(-2.25,-3.527) 3(-1.75,-3.527) 4(-1.25,-3.527) 5(-0.75,-3.527) 6(-0.25,-3.527) 7(0.25,-3.527) 8(0.75,-3.527) 9(1.25,-3.527) 10(1.75,-3.527) 11(2.25,-3.527) 12(2.75,-3.527) 25(2.75,3.527) 26(2.25,3.527) 27(1.75,3.527) 28(1.25,3.527) 29(0.75,3.527) 30(0.25,3.527) 31(-0.25,3.527) 32(-0.75,3.527) 33(-1.25,3.527) 34(-1.75,3.527) 35(-2.25,3.527) 36(-2.75,3.527)
  rect 0.754x0.25 smd: 13(3.527,-2.75) 14(3.527,-2.25) 15(3.527,-1.75) 16(3.527,-1.25) 17(3.527,-0.75) 18(3.527,-0.25) 19(3.527,0.25) 20(3.527,0.75) 21(3.527,1.25) 22(3.527,1.75) 23(3.527,2.25) 24(3.527,2.75) 37(-3.527,2.75) 38(-3.527,2.25) 39(-3.527,1.75) 40(-3.527,1.25) 41(-3.527,0.75) 42(-3.527,0.25) 43(-3.527,-0.25) 44(-3.527,-0.75) 45(-3.527,-1.25) 46(-3.527,-1.75) 47(-3.527,-2.25) 48(-3.527,-2.75)
  rect 3.5x3.5 smd: 49(0,0)
QFP-100
  oval 1.6x0.22 smd: 1(-8,6) 2(-8,5.5) 3(-8,5) 4(-8,4.5) 5(-8,4) 6(-8,3.5) 7(-8,3) 8(-8,2.5) 9(-8,2) 10(-8,1.5) 11(-8,1) 12(-8,0.5) 13(-8,0) 14(-8,-0.5) 15(-8,-1) 16(-8,-1.5) 17(-8,-2) 18(-8,-2.5) 19(-8,-3) 20(-8,-3.5) 21(-8,-4) 22(-8,-4.5) 23(-8,-5) 24(-8,-5.5) 25(-8,-6) 51(8,-6) 52(8,-5.5) 53(8,-5) 54(8,-4.5) 55(8,-4) 56(8,-3.5) 57(8,-3) 58(8,-2.5) 59(8,-2) 60(8,-1.5) 61(8,-1) 62(8,-0.5) 63(8,0) 64(8,0.5) 65(8,1) 66(8,1.5) 67(8,2) 68(8,2.5) 69(8,3) 70(8,3.5) 71(8,4) 72(8,4.5) 73(8,5) 74(8,5.5) 75(8,6)
  oval 0.22x1.6 smd: 26(-6,-8) 27(-5.5,-8) 28(-5,-8) 29(-4.5,-8) 30(-4,-8) 31(-3.5,-8) 32(-3,-8) 33(-2.5,-8) 34(-2,-8) 35(-1.5,-8) 36(-1,-8) 37(-0.5,-8) 38(0,-8) 39(0.5,-8) 40(1,-8) 41(1.5,-8) 42(2,-8) 43(2.5,-8) 44(3,-8) 45(3.5,-8) 46(4,-8) 47(4.5,-8) 48(5,-8) 49(5.5,-8) 50(6,-8) 76(6,8) 77(5.5,8) 78(5,8) 79(4.5,8) 80(4,8) 81(3.5,8) 82(3,8) 83(2.5,8) 84(2,8) 85(1.5,8) 86(1,8) 87(0.5,8) 88(0,8) 89(-0.5,8) 90(-1,8) 91(-1.5,8) 92(-2,8) 93(-2.5,8) 94(-3,8) 95(-3.5,8) 96(-4,8) 97(-4.5,8) 98(-5,8) 99(-5.5,8) 100(-6,8)
QFP-128HPAD
  oval 1.2x0.18 smd: 1(-7.9,6.2) 2(-7.9,5.8) 3(-7.9,5.4) 4(-7.9,5) 5(-7.9,4.6) 6(-7.9,4.2) 7(-7.9,3.8) 8(-7.9,3.4) 9(-7.9,3) 10(-7.9,2.6) 11(-7.9,2.2) 12(-7.9,1.8) 13(-7.9,1.4) 14(-7.9,1) 15(-7.9,0.6) 16(-7.9,0.2) 17(-7.9,-0.2) 18(-7.9,-0.6) 19(-7.9,-1) 20(-7.9,-1.4) 21(-7.9,-1.8) 22(-7.9,-2.2) 23(-7.9,-2.6) 24(-7.9,-3) 25(-7.9,-3.4) 26(-7.9,-3.8) 27(-7.9,-4.2) 28(-7.9,-4.6) 29(-7.9,-5) 30(-7.9,-5.4) 31(-7.9,-5.8) 32(-7.9,-6.2) 65(7.9,-6.2) 66(7.9,-5.8) 67(7.9,-5.4) 68(7.9,-5) 69(7.9,-4.6) 70(7.9,-4.2) 71(7.9,-3.8) 72(7.9,-3.4) 73(7.9,-3) 74(7.9,-2.6) 75(7.9,-2.2) 76(7.9,-1.8) 77(7.9,-1.4) 78(7.9,-1) 79(7.9,-0.6) 80(7.9,-0.2) 81(7.9,0.2) 82(7.9,0.6) 83(7.9,1) 84(7.9,1.4) 85(7.9,1.8) 86(7.9,2.2) 87(7.9,2.6) 88(7.9,3) 89(7.9,3.4) 90(7.9,3.8) 91(7.9,4.2) 92(7.9,4.6) 93(7.9,5) 94(7.9,5.4) 95(7.9,5.8) 96(7.9,6.2)
  oval 0.18x1.2 smd: 33(-6.2,-7.9) 34(-5.8,-7.9) 35(-5.4,-7.9) 36(-5,-7.9) 37(-4.6,-7.9) 38(-4.2,-7.9) 39(-3.8,-7.9) 40(-3.4,-7.9) 41(-3,-7.9) 42(-2.6,-7.9) 43(-2.2,-7.9) 44(-1.8,-7.9) 45(-1.4,-7.9) 46(-1,-7.9) 47(-0.6,-7.9) 48(-0.2,-7.9) 49(0.2,-7.9) 50(0.6,-7.9) 51(1,-7.9) 52(1.4,-7.9) 53(1.8,-7.9) 54(2.2,-7.9) 55(2.6,-7.9) 56(3,-7.9) 57(3.4,-7.9) 58(3.8,-7.9) 59(4.2,-7.9) 60(4.6,-7.9) 61(5,-7.9) 62(5.4,-7.9) 63(5.8,-7.9) 64(6.2,-7.9) 97(6.2,7.9) 98(5.8,7.9) 99(5.4,7.9) 100(5,7.9) 101(4.6,7.9) 102(4.2,7.9) 103(3.8,7.9) 104(3.4,7.9) 105(3,7.9) 106(2.6,7.9) 107(2.2,7.9) 108(1.8,7.9) 109(1.4,7.9) 110(1,7.9) 111(0.6,7.9) 112(0.2,7.9) 113(-0.2,7.9) 114(-0.6,7.9) 115(-1,7.9) 116(-1.4,7.9) 117(-1.8,7.9) 118(-2.2,7.9) 119(-2.6,7.9) 120(-3,7.9) 121(-3.4,7.9) 122(-3.8,7.9) 123(-4.2,7.9) 124(-4.6,7.9) 125(-5,7.9) 126(-5.4,7.9) 127(-5.8,7.9) 128(-6.2,7.9)
  rect 9x9 smd: 129(0,0)
R0603
  rect 0.889x0.762 smd: 1(-0.762,0) 2(0.762,0)
RN-8P
  rect 1x0.4 smd: 1(0,0) 2(0,-0.8) 3(0,-1.6) 4(0,-2.4) 5(1.858,-2.4) 6(1.858,-1.6) 7(1.858,-0.8) 8(1.858,0)
SMTDR75-100M
  rect 2.349x3.5 smd: 1(-3.025,0) 2(3.025,0)
SO8
  rect 1.524x0.61 smd: 1(0,0) 2(0,-1.27) 3(0,-2.54) 4(0,-3.81) 5(5.588,-3.81) 6(5.588,-2.54) 7(5.588,-1.27) 8(5.588,0)
SOT23
  rect 0.91x0.91 smd: 1(0,0) 2(1.9,0)
  rect 0.91x1.27 smd: 3(0.97,2.03)
SX2-1205
  rect 1.397x1.194 smd: 1(-1.1,-0.85) 2(1.1,-0.85) 3(1.1,0.85) 4(-1.1,0.85)
unnamed
  rect 5x5 hole 3: 1(0,0)
unnamed#2
  round 1.016 smd: 1(0,0)

## Nets
1V8_VCC: C172.1 C173.1 C174.1 C175.1 C176.1 C177.1 C178.1 C179.1 C184.1 L16.2 U13.12(CVCC18#12) U13.24(CVCC18#24) U13.36(CVCC18#36) U13.45(CVCC18#45) U13.66(DVCC18) U13.81(CVCC18#81) U13.82(AUDPVCC18) U13.112(CVCC18#112) U13.125(CVCC18#125)
3V3_AVCC: C157.1 C158.1 C159.1 C160.1 C161.1 C162.1 C183.1 L18.2 U13.47(PVCC) U13.49(AVCC#49) U13.53(AVCC#53) U13.57(AVCC#57) U13.61(AVCC#61)
3V3_DVCC: C163.1 C164.1 C165.1 C166.1 C167.1 C168.1 C169.1 C170.1 C171.1 C185.1 L17.2 U13.7(IOVCC#7) U13.19(IOVCC#19) U13.31(IOVCC#31) U13.68(IOVCC#68) U13.77(IOVCC#77) U13.86(XTALVCC) U13.87(REGVCC) U13.98(IOVCC#98) U13.107(IOVCC#107) U13.120(IOVCC#120)
+1.2V: C210.1 C218.1 C233.1 C234.1 C236.1 C237.1 C238.1 C239.1 C242.1 C244.1 C246.1 C247.1 C248.1 C249.1 C250.1 C263.1 C264.1 C265.1 C266.1 C267.1 L4.1 L5.1 L9.1 L10.1 L20.2 R164.1 U2.14(DVDDL1) U2.18(DVDDL2) U2.23(DVDDL6) U2.26(DVDDL3) U2.30(DVDDL4) U2.39(DVDDL5) U3.14(DVDDL1) U3.18(DVDDL2) U3.23(DVDDL6) U3.26(DVDDL3) U3.30(DVDDL4) U3.39(DVDDL5)
+1.8V: C76.1 C223.1 C224.1 C226.1 C227.1 C228.1 C229.1 L8.2 L15.2 L16.1 L19.2 R160.1
+3.3V: C78.1 C79.1 C80.1 C147.1 C148.1 C149.1 C150.1 C151.1 C152.1 C182.1 C192.1 C193.1 C194.1 C195.1 C197.1 C202.1 C204.1 C205.1 C206.1 C217.1 D1.2 D2.2 D3.2 D4.2 J3.11(LD1_A) J3.14(LD2_A) J4.11(LD1_A) J4.14(LD2_A) J7.4(VDD) J9.4 J9.6 J11.39 J11.40 J13.39 J13.40 J18.15 J18.16 L3.1 L6.1 L7.1 L14.2 L17.1 L18.1 LED1.1(ANODE) LED2.1(ANODE) LED3.1(ANODE) LED4.1(ANODE) LED5.1(ANODE) LED6.1(ANODE) LED7.1(ANODE) R62.2 R63.2 R64.1 R65.1 R67.2 R68.2 R69.1 R72.2 R73.2 R74.2 R75.2 R76.2 R77.2 R80.2 R81.2 R82.1 R86.2 R87.2 R88.2 R89.2 R90.2 R91.2 R94.2 R95.2 R103.1 R104.2 R105.2 R106.2 R107.2 R111.2 R112.2 R113.2 R131.2 R143.1 R159.2 U2.16(DVDDH1) U2.34(DVDDH2) U2.40(DVDDH3) U3.16(DVDDH1) U3.34(DVDDH2) U3.40(DVDDH3) U9.8(VCC)
+3.3V_PCIE: P1.A9(+3.3V3) P1.A10(+3.3V2) P1.B8(+3.3V1)
+5.0V: C138.1 C139.1 C140.1 C141.1 C142.1 C143.1 CON1.1 CON1.2 CON1.3 CON1.4 CON1.5 CON1.6 CON1.7 CON1.8 F2.1 J11.2 J13.2 L13.2 R139.1 U10.45(DDCPWR5V)
+12V: C133.1 C134.1 C136.1 C146.1 C225.1 C235.1 F1.2 R138.1 R142.1 R157.1 R163.1 U6.2(IN) U7.2(IN) U8.2(IN) U11.2(IN)
+12V_PCIE: D25.1(ANODE) P1.A2(+12V5) P1.A3(+12V4) P1.B1(+12V1) P1.B2(+12V2) P1.B3(+12V3)
AVDDH_E1: C198.1 C207.1 C208.1 L3.2 U2.1(AVDDH1) U2.12(AVDDH2) U2.47(NC2)
AVDDH_E2: C203.1 C209.1 C214.1 L6.2 U3.1(AVDDH1) U3.12(AVDDH2) U3.47(NC2)
AVDDL_E1: C211.1 C245.1 C251.1 L4.2 U2.4(AVDDL2) U2.9(AVDDL1)
AVDDL_E2: C215.1 C259.1 C260.1 L9.2 U3.4(AVDDL2) U3.9(AVDDL1)
AVDDL_PLL_E1: C213.1 C252.1 C253.1 L5.2 U2.44(AVDDL_PLL)
AVDDL_PLL_E2: C216.1 C261.1 C262.1 L10.2 U3.44(AVDDL_PLL)
GND: C61.2 C62.2 C63.2 C64.2 C65.2 C66.2 C67.2 C68.2 C69.2 C70.2 C71.1 C72.2 C73.2 C74.2 C75.2 C76.2 C77.2 C78.2 C79.2 C80.2 C129.2 C130.2 C133.2 C134.2 C136.2 C137.2 C138.2 C139.2 C140.2 C141.2 C142.2 C143.2 C146.2 C147.2 C148.2 C149.2 C150.2 C151.2 C152.2 C153.2 C157.2 C158.2 C159.2 C160.2 C161.2 C162.2 C163.2 C164.2 C165.2 C166.2 C167.2 C168.2 C169.2 C170.2 C171.2 C172.2 C173.2 C174.2 C175.2 C176.2 C177.2 C178.2 C179.2 C180.2 C181.2 C182.2 C183.2 C184.2 C185.2 C186.2 C187.2 C188.2 C189.2 C190.2 C191.2 C192.2 C193.2 C194.2 C195.2 C196.2 C197.2 C198.2 C199.2 C200.2 C201.2 C202.2 C203.2 C204.2 C205.2 C206.2 C207.2 C208.2 C209.2 C210.2 C211.2 C213.2 C214.2 C215.2 C216.2 C217.2 C218.2 C219.2 C220.2 C223.2 C224.2 C225.2 C226.2 C227.2 C228.2 C229.2 C231.2 C233.2 C234.2 C235.2 C236.2 C237.2 C238.2 C239.2 C240.2 C242.2 C244.2 C245.2 C246.2 C247.2 C248.2 C249.2 C250.2 C251.2 C252.2 C253.2 C259.2 C260.2 C261.2 C262.2 C263.2 C264.2 C265.2 C266.2 C267.2 CN1.1 CN1.2 CON1.9 CON1.10 CON1.19 CON1.20 CON1.29 CON1.30 CON1.39 CON1.40 CON1.49 CON1.50 CON1.59 CON1.60 CON1.69 CON1.70 CON2.9 CON2.10 CON2.19 CON2.20 CON2.29 CON2.30 CON2.39 CON2.40 CON2.49 CON2.50 CON2.59 CON2.60 CON2.69 CON2.70 CON3.9 CON3.10 CON3.19 CON3.20 CON3.29 CON3.30 CON3.39 CON3.40 CON3.49 CON3.50 CON3.59 CON3.60 CON3.69 CON3.70 CON4.9 CON4.10 CON4.15 CON4.16 CON4.21 CON4.22 CON4.27 CON4.28 CON4.33 CON4.34 CON4.39 CON4.40 CON4.49 CON4.50 CON4.59 CON4.60 CON4.69 CON4.70 D1.1 D2.1 D3.1 D4.1 J3.15(M1) J3.16(M2) J3.P10(CASE) J4.15(M1) J4.16(M2) J4.P10(CASE) J7.6(VSS) J7.10(GND1) J7.11(GND2) J7.12(GND3) J7.13(GND4) J9.2 J9.10 J10.5(GND) J10.6(SH1) J10.7(SH2) J10.8(SH3) J10.9(SH4) J11.1 J11.37 J11.38 J12.2(D2 SHIELD) J12.5(D1 SHIELD) J12.8(D0 SHIELD) J12.11(CK SHIELD) J12.17(GND) J12.20(SHELL1) J12.21(SHELL2) J12.22(SHELL3) J12.23(SHELL4) J13.1 J13.37 J13.38 J14.4(GND#4) J14.5(GND#5) J14.6(GND#6) J15.2(D2 SHIELD) J15.5(D1 SHIELD) J15.8(D0 SHIELD) J15.11(CK SHIELD) J15.17(GND) J15.20(SHELL1) J15.21(SHELL2) J15.22(SHELL3) J15.23(SHELL4) J18.3 J18.4 J18.7 J18.8 J18.11 J18.12 KEY1.2(P2) KEY2.2(P2) P1.A4(GND37) P1.A12(GND36) P1.A15(GND35) P1.A18(GND34) P1.A20(GND33) P1.A23(GND32) P1.A24(GND31) P1.A27(GND30) P1.A28(GND29) P1.A31(GND28) P1.B4(GND1) P1.B7(GND2) P1.B13(GND3) P1.B16(GND4) P1.B18(GND5) P1.B21(GND6) P1.B22(GND7) P1.B25(GND8) P1.B26(GND9) P1.B29(GND10) P1.B32(GND11) R51.2 R55.2 R57.2 R59.2 R70.1 R78.1 R79.1 R83.1 R92.1 R93.1 R136.1 R140.2 R141.2 R144.2 R145.2 R147.1 R156.2 R161.2 R162.2 R165.2 S1.1 S2.1 S3.1 S4.1 U2.13(NC1) U2.29(VSS) U2.49(P_GND) U3.13(NC1) U3.29(VSS) U3.49(P_GND) U5.3(GND) U6.4(GND) U7.4(GND) U8.4(GND) U9.1(A0) U9.2(A1) U9.3(A2) U9.4(GND) U10.13(GND#13) U10.26(AGND#26) U10.29(AGND#29) U10.35(AGND#35) U10.41(AGND#41) U10.43(AGND#43) U10.54(GND#54) U10.65(GND#65) U10.67(D27) U10.68(D26) U10.69(D25) U10.70(D24) U10.80(D15) U10.81(D14) U10.82(D13) U10.83(D12) U10.87(GND#87) U10.95(D3) U10.96(D2) U10.97(D1) U10.98(D0) U10.100(GND#100) U11.4(GND) U13.6(IOGND#6) U13.13(CGND#13) U13.18(IOGND#18) U13.25(CGND#25) U13.30(IOGND#30) U13.37(CGND#37) U13.38(CI2CA) U13.46(PGND) U13.52(AGND#52) U13.56(AGND#56) U13.60(AGND#60) U13.64(AGND#64) U13.65(DGND) U13.69(IOGND#69) U13.78(IOGND#78) U13.80(CGND#80) U13.83(AUDPGND) U13.88(RSVDL) U13.97(IOGND#97) U13.106(IOGND#106) U13.113(CGND#113) U13.118(IOGND#118) U13.126(CGND#126) U13.129(THPAD) U14.1(A0) U14.2(A1) U14.3(A2) U14.4(GND) Y2.2 Y2.4 Y3.2 Y3.4 Y4.2 Y4.4
9013_CLK: CON3.36 R137.1
9013_D0: CON3.46 U13.124(QE0)
9013_D1: CON3.44 U13.123(QE1)
9013_D2: CON3.42 U13.122(QE2)
9013_D3: CON3.38 U13.121(QE3)
9013_D4: CON3.34 U13.117(QE4)
9013_D5: CON3.32 U13.116(QE5)
9013_D6: CON3.28 U13.115(QE6)
9013_D7: CON3.26 U13.114(QE7)
9013_D8: CON3.24 U13.111(QE8)
9013_D9: CON3.22 U13.110(QE9)
9013_D10: CON3.18 U13.109(QE10)
9013_D11: CON3.16 U13.108(QE11)
9013_D12: CON3.14 U13.105(QE12)
9013_D13: CON3.12 U13.104(QE13)
9013_D14: CON3.8 U13.103(QE14)
9013_D15: CON3.6 U13.102(QE15)
9013_D16: CON3.4 U13.101(QE16)
9013_D17: CON3.2 U13.100(QE17)
9013_D18: CON3.1 U13.99(QE18)
9013_D19: CON3.3 U13.96(QE19)
9013_D20: CON3.5 U13.95(QE20)
9013_D21: CON3.7 U13.94(QE21)
9013_D22: CON3.11 U13.93(QE22)
9013_D23: CON3.13 U13.92(QE23)
9013_DE: CON3.48 U13.127(DE)
9013_HS: CON3.52 U13.128(HSYNC)
9013_NRESET: CON3.17 U13.89(RESETN)
9013_VS: CON3.54 U13.1(VSYNC)
9134_CLK: CON3.45 U10.88(IDCK)
9134_D0: CON2.13 U10.94(D4)
9134_D1: CON3.35 U10.93(D5)
9134_D2: CON3.37 U10.92(D6)
9134_D3: CON3.41 U10.91(D7)
9134_D4: CON3.43 U10.90(D8)
9134_D5: CON3.47 U10.86(D9)
9134_D6: CON3.51 U10.85(D10)
9134_D7: CON3.53 U10.84(D11)
9134_D8: CON3.55 U10.79(D16)
9134_D9: CON3.57 U10.78(D17)
9134_D10: CON3.61 U10.77(D18)
9134_D11: CON3.63 U10.75(D19)
9134_D12: CON3.65 U10.74(D20)
9134_D13: CON3.67 U10.73(D21)
9134_D14: CON3.71 U10.72(D22)
9134_D15: CON3.73 U10.71(D23)
9134_D16: CON3.74 U10.63(D28)
9134_D17: CON3.72 U10.62(D29)
9134_D18: CON3.68 U10.61(D30)
9134_D19: CON3.66 U10.60(D31)
9134_D20: CON3.64 U10.59(D32)
9134_D21: CON3.62 U10.58(D33)
9134_D22: CON3.58 U10.57(D34)
9134_D23: CON3.56 U10.56(D35)
9134_DE: CON2.11 U10.1(DE)
9134_HS: CON2.7 U10.2(HSYNC)
9134_NRESET: CON3.15 U10.25(RESET#)
9134_VS: CON2.5 U10.3(VSYNC)
CEC_A: J12.13(CE REMOTE)
DSCL: J15.15(DDC CLK) R108.2
DSCL_17090369: J12.15(DDC CLK) R53.2 R60.1
DSDA: J15.16(DDC DATA) R109.2
DSDA_17090369: J12.16(DDC DATA) R54.2 R61.1
E1_125M_CLK: R72.1 U2.41(CLK125_NDO/LED_MODE)
E1_GTXC: CON4.67 U2.24(GTX_CLK)
E1_MDC: CON4.47 R67.1 U2.36(MDC)
E1_MDIO: CON4.45 R68.1 U2.37(MDIO)
E1_RESET: CON4.43 U2.42(RESET_N)
E1_RXC: CON4.55 R78.2 U2.35(RX_CLK/PHYAD2)
E1_RXD0: CON4.53 R75.1 U2.32(RXD0/MODE0)
E1_RXD1: CON4.57 R76.1 U2.31(RXD1/MODE1)
E1_RXD2: CON4.61 R74.1 U2.28(RXD2/MODE2)
E1_RXD3: CON4.63 R73.1 U2.27(RXD3/MODE3)
E1_RXDV: CON4.51 R80.1 U2.33(RX_DV/CLK125_EN)
E1_TXD0: CON4.77 U2.19(TXD0)
E1_TXD1: CON4.75 U2.20(TXD1)
E1_TXD2: CON4.73 U2.21(TXD2)
E1_TXD3: CON4.71 U2.22(TXD3)
E1_TXEN: CON4.65 U2.25(TX_EN)
E2_125M_CLK: R86.1 U3.41(CLK125_NDO/LED_MODE)
E2_GTXC: CON4.54 U3.24(GTX_CLK)
E2_MDC: CON4.74 R95.1 U3.36(MDC)
E2_MDIO: CON4.76 R81.1 U3.37(MDIO)
E2_RESET: CON4.78 U3.42(RESET_N)
E2_RXC: CON4.62 R92.2 U3.35(RX_CLK/PHYAD2)
E2_RXD0: CON4.68 R90.1 U3.32(RXD0/MODE0)
E2_RXD1: CON4.66 R89.1 U3.31(RXD1/MODE1)
E2_RXD2: CON4.64 R87.1 U3.28(RXD2/MODE2)
E2_RXD3: CON4.58 R88.1 U3.27(RXD3/MODE3)
E2_RXDV: CON4.72 R94.1 U3.33(RX_DV/CLK125_EN)
E2_TXD0: CON4.44 U3.19(TXD0)
E2_TXD1: CON4.46 U3.20(TXD1)
E2_TXD2: CON4.48 U3.21(TXD2)
E2_TXD3: CON4.52 U3.22(TXD3)
E2_TXEN: CON4.56 U3.25(TX_EN)
EEPROM_I2C_SCL: CON1.63 R64.2 U9.6(SCL)
EEPROM_I2C_SDA: CON1.65 R65.2 U9.5(SDA)
EPAD1: U5.29
EPAD2: U5.30
EX_IO1_1N: J11.4 RN1.7
EX_IO1_1P: J11.3 RN1.8
EX_IO1_2N: J11.5 RN1.6
EX_IO1_2P: J11.6 RN1.5
EX_IO1_3N: J11.8 RN2.7
EX_IO1_3P: J11.7 RN2.8
EX_IO1_4N: J11.9 RN2.6
EX_IO1_4P: J11.10 RN2.5
EX_IO1_5N: J11.12 RN3.7
EX_IO1_5P: J11.11 RN3.8
EX_IO1_6N: J11.14 RN3.5
EX_IO1_6P: J11.13 RN3.6
EX_IO1_7N: J11.16 RN4.7
EX_IO1_7P: J11.15 RN4.8
EX_IO1_8N: J11.18 RN4.5
EX_IO1_8P: J11.17 RN4.6
EX_IO1_9N: J11.20 RN5.7
EX_IO1_9P: J11.19 RN5.8
EX_IO1_10N: J11.22 RN5.5
EX_IO1_10P: J11.21 RN5.6
EX_IO1_11N: J11.23 RN6.8
EX_IO1_11P: J11.24 RN6.7
EX_IO1_12N: J11.25 RN6.6
EX_IO1_12P: J11.26 RN6.5
EX_IO1_13N: J11.27 RN7.8
EX_IO1_13P: J11.28 RN7.7
EX_IO1_14N: J11.30 RN7.5
EX_IO1_14P: J11.29 RN7.6
EX_IO1_15N: J11.32 RN8.7
EX_IO1_15P: J11.31 RN8.8
EX_IO1_16N: J11.34 RN8.5
EX_IO1_16P: J11.33 RN8.6
EX_IO1_17N: J11.36 RN9.7
EX_IO1_17P: J11.35 RN9.8
EX_IO2_1N: J13.3 RN10.8
EX_IO2_1P: J13.4 RN10.7
EX_IO2_2N: J13.6 RN10.5
EX_IO2_2P: J13.5 RN10.6
EX_IO2_3N: J13.8 RN13.7
EX_IO2_3P: J13.7 RN13.8
EX_IO2_4N: J13.10 RN13.5
EX_IO2_4P: J13.9 RN13.6
EX_IO2_5N: J13.11 RN11.8
EX_IO2_5P: J13.12 RN11.7
EX_IO2_6N: J13.13 RN11.6
EX_IO2_6P: J13.14 RN11.5
EX_IO2_7N: J13.16 RN12.7
EX_IO2_7P: J13.15 RN12.8
EX_IO2_8N: J13.17 RN12.6
EX_IO2_8P: J13.18 RN12.5
EX_IO2_9N: J13.19 RN14.8
EX_IO2_9P: J13.20 RN14.7
EX_IO2_10N: J13.22 RN14.5
EX_IO2_10P: J13.21 RN14.6
EX_IO2_11N: J13.24 RN15.7
EX_IO2_11P: J13.23 RN15.8
EX_IO2_12N: J13.25 RN15.6
EX_IO2_12P: J13.26 RN15.5
EX_IO2_13N: J13.27 RN16.8
EX_IO2_13P: J13.28 RN16.7
EX_IO2_14N: J13.29 RN16.6
EX_IO2_14P: J13.30 RN16.5
EX_IO2_15N: J13.31 RN17.8
EX_IO2_15P: J13.32 RN17.7
EX_IO2_16N: J13.33 RN17.6
EX_IO2_16P: J13.34 RN17.5
EX_IO2_17N: J13.36 RN18.7
EX_IO2_17P: J13.35 RN18.8
FPGA_TCK: CON3.77 D1.3 R121.2
FPGA_TDI: CON3.78 D4.3 R124.2
FPGA_TDO: CON3.79 D2.3 R122.2
FPGA_TMS: CON3.80 D3.3 R123.2
HDMI-VCC: J15.18(+5V) J15.19(HP DET) R110.1 R146.1 U13.44(PWR5V) U14.8(VCC)
HDMI-VCC1: F2.2 J12.18(+5V) R60.2 R61.2
HDMI_SCL: CON4.41 R62.1 U10.48(CSCL) U13.40(CSCL)
HDMI_SDA: CON4.42 R63.1 U10.49(CSDA) U13.39(CSDA)
HP_DET: J12.19(HP DET) R56.2 R59.1
IO1_1N: CON2.75 RN1.2
IO1_1P: CON2.77 RN1.1
IO1_2N: CON2.73 RN1.3
IO1_2P: CON2.71 RN1.4
IO1_3N: CON2.65 RN2.2
IO1_3P: CON2.67 RN2.1
IO1_4N: CON2.63 RN2.3
IO1_4P: CON2.61 RN2.4
IO1_5N: CON2.55 RN3.2
IO1_5P: CON2.57 RN3.1
IO1_6N: CON2.51 RN3.4
IO1_6P: CON2.53 RN3.3
IO1_7N: CON2.45 RN4.2
IO1_7P: CON2.47 RN4.1
IO1_8N: CON2.41 RN4.4
IO1_8P: CON2.43 RN4.3
IO1_9N: CON2.35 RN5.2
IO1_9P: CON2.37 RN5.1
IO1_10N: CON2.31 RN5.4
IO1_10P: CON2.33 RN5.3
IO1_11N: CON2.27 RN6.1
IO1_11P: CON2.25 RN6.2
IO1_12N: CON2.23 RN6.3
IO1_12P: CON2.21 RN6.4
IO1_13N: CON2.17 RN7.1
IO1_13P: CON2.15 RN7.2
IO1_14N: CON1.18 RN7.4
IO1_14P: CON1.16 RN7.3
IO1_15N: CON1.24 RN8.2
IO1_15P: CON1.22 RN8.1
IO1_16N: CON1.28 RN8.4
IO1_16P: CON1.26 RN8.3
IO1_17N: CON1.34 RN9.2
IO1_17P: CON1.32 RN9.1
IO2_1N: CON2.3 RN10.1
IO2_1P: CON2.1 RN10.2
IO2_2N: CON2.4 RN10.4
IO2_2P: CON2.2 RN10.3
IO2_3N: CON2.8 RN13.2
IO2_3P: CON2.6 RN13.1
IO2_4N: CON2.14 RN13.4
IO2_4P: CON2.12 RN13.3
IO2_5N: CON2.16 RN11.1
IO2_5P: CON2.18 RN11.2
IO2_6N: CON2.22 RN11.3
IO2_6P: CON2.24 RN11.4
IO2_7N: CON2.28 RN12.2
IO2_7P: CON2.26 RN12.1
IO2_8N: CON2.32 RN12.3
IO2_8P: CON2.34 RN12.4
IO2_9N: CON2.36 RN14.1
IO2_9P: CON2.38 RN14.2
IO2_10N: CON2.44 RN14.4
IO2_10P: CON2.42 RN14.3
IO2_11N: CON2.48 RN15.2
IO2_11P: CON2.46 RN15.1
IO2_12N: CON2.52 RN15.3
IO2_12P: CON2.54 RN15.4
IO2_13N: CON2.56 RN16.1
IO2_13P: CON2.58 RN16.2
IO2_14N: CON2.62 RN16.3
IO2_14P: CON2.64 RN16.4
IO2_15N: CON2.66 RN17.1
IO2_15P: CON2.68 RN17.2
IO2_16N: CON2.72 RN17.3
IO2_16P: CON2.74 RN17.4
IO2_17N: CON2.78 RN18.2
IO2_17P: CON2.76 RN18.1
KEY1: CON3.23 R133.2
KEY2: CON1.67 R158.2
LED1: CON1.77 R135.1
LED2: CON1.75 R134.1
LED3: CON1.73 R152.1
LED4: CON1.71 R153.1
PCIE_CLK_N: C112.2 CON4.38
PCIE_CLK_P: C111.2 CON4.36
PCIE_PERST: CON3.21 P1.A11(PERST) R103.2
PCIE_RX0_N: CON4.37 P1.B15(PETN0)
PCIE_RX0_P: CON4.35 P1.B14(PETP0)
PCIE_RX1_N: CON4.32 P1.B20(PETN1)
PCIE_RX1_P: CON4.30 P1.B19(PETP1)
PCIE_RX2_N: CON4.20 P1.B24(PETN2)
PCIE_RX2_P: CON4.18 P1.B23(PETP2)
PCIE_RX3_N: CON4.25 P1.B28(PETN3)
PCIE_RX3_P: CON4.23 P1.B27(PETP3)
PCIE_TX0_N: C110.2 CON4.31
PCIE_TX0_P: C109.2 CON4.29
PCIE_TX1_N: C115.2 CON4.26
PCIE_TX1_P: C116.2 CON4.24
PCIE_TX2_N: C113.2 CON4.14
PCIE_TX2_P: C114.2 CON4.12
PCIE_TX3_N: C155.2 CON4.19
PCIE_TX3_P: C156.2 CON4.17
PHY1_AD0/LED1: R66.1 R77.1 U2.17(LED1 / PME_N1/PHYAD0)
PHY1_AD1/LED2: R71.1 R79.2 U2.15(LED2/PHYAD1)
PHY1_LDO: U2.43(LDO_O)
PHY1_MDI0_N: J3.P3(TRD0-) U2.3(TXRXM_A)
PHY1_MDI0_P: J3.P2(TRD0+) U2.2(TXRXP_A)
PHY1_MDI1_N: J3.P7(TRD1-) U2.6(TXRXM_B)
PHY1_MDI1_P: J3.P4(TRD1+) U2.5(TXRXP_B)
PHY1_MDI2_N: J3.P6(TRD2-) U2.8(TXRXM_C)
PHY1_MDI2_P: J3.P5(TRD2+) U2.7(TXRXP_C)
PHY1_MDI3_N: J3.P9(TRD3-) U2.11(TXRXM_D)
PHY1_MDI3_P: J3.P8(TRD3+) U2.10(TXRXP_D)
PHY2_AD0/LED1: R84.1 R91.1 U3.17(LED1 / PME_N1/PHYAD0)
PHY2_AD1/LED2: R85.1 R93.2 U3.15(LED2/PHYAD1)
PHY2_LDO: U3.43(LDO_O)
PHY2_MDI0_N: J4.P3(TRD0-) U3.3(TXRXM_A)
PHY2_MDI0_P: J4.P2(TRD0+) U3.2(TXRXP_A)
PHY2_MDI1_N: J4.P7(TRD1-) U3.6(TXRXM_B)
PHY2_MDI1_P: J4.P4(TRD1+) U3.5(TXRXP_B)
PHY2_MDI2_N: J4.P6(TRD2-) U3.8(TXRXM_C)
PHY2_MDI2_P: J4.P5(TRD2+) U3.7(TXRXP_C)
PHY2_MDI3_N: J4.P9(TRD3-) U3.11(TXRXM_D)
PHY2_MDI3_P: J4.P8(TRD3+) U3.10(TXRXP_D)
PRSNT: P1.A1(PRSNT1_N) R101.1 R102.1
RX_0N: J15.9(D0-) U13.54(RX0N)
RX_0P: J15.7(D0+) U13.55(RX0P)
RX_1N: J15.6(D1-) U13.58(RX1N)
RX_1P: J15.4(D1+) U13.59(RX1P)
RX_2N: J15.3(D2-) U13.62(RX2N)
RX_2P: J15.1(D2+) U13.63(RX2P)
RX_CN: J15.12(CK-) U13.50(RXCN)
RX_CP: J15.10(CK+) U13.51(RXCP)
SD_CD_N: CON1.61 J7.9(CD) R104.1
SD_CLK: CON1.27 J7.5(CLK) R113.1
SD_CMD: CON1.25 J7.3(CMD) R111.1
SD_DAT0: CON1.31 J7.7(DAT0) R105.1
SD_DAT1: CON1.33 J7.8(DAT1) R112.1
SD_DAT2: CON1.21 J7.1(DAT2) R107.1
SD_DAT3: CON1.23 J7.2(CD/DAT3) R106.1
TX_0N: J12.9(D0-) U10.33(TX0-)
TX_0P: J12.7(D0+) U10.34(TX0+)
TX_1N: J12.6(D1-) U10.36(TX1-)
TX_1P: J12.4(D1+) U10.37(TX1+)
TX_2N: J12.3(D2-) U10.39(TX2-)
TX_2P: J12.1(D2+) U10.40(TX2+)
TX_CN: J12.12(CK-) U10.30(TXC-)
TX_CP: J12.10(CK+) U10.31(TXC+)
UART1_RXD: CON2.79 R126.1 U5.26(TXD)
UART1_TXD: CON2.80 R127.1 U5.25(RXD)
VIDEO1_AVCC: C72.1 C73.1 C74.1 C75.1 L15.1 R58.2 U10.28(PVCC1) U10.32(AVCC18#32) U10.38(AVCC18#38) U10.42(PVCC2)
VIDEO1_CORE: C65.1 C66.1 C67.1 C68.1 C69.1 C70.1 L8.1 U10.12(CVCC18#12) U10.55(CVCC18#55) U10.64(CVCC18#64) U10.76(CVCC18#76) U10.99(CVCC18#99)
VIDEO1_VCCIO: C61.1 C62.1 C63.1 C64.1 C77.1 L7.2 R52.2 U10.14(IOVCC33#14) U10.53(IOVCC33#53) U10.66(IOVCC33#66) U10.89(IOVCC33#89)
XADC_AD0N: C82.2 CON3.25 R151.2
XADC_AD0N_C: J18.10 R151.1
XADC_AD0P: C82.1 CON3.27 R150.2
XADC_AD0P_C: J18.9 R150.1
XADC_AD9N: C84.2 CON3.33 R155.2
XADC_AD9N_C: J18.6 R155.1
XADC_AD9P: C84.1 CON3.31 R154.2
XADC_AD9P_C: J18.5 R154.1
XADC_VN: C81.2 CON1.51 R149.2
XADC_VN_C: J18.2 R149.1
XADC_VP: C81.1 CON1.53 R148.2
XADC_VP_C: J18.1 R148.1
N16762130: C154.2 R145.1
N16762134: C145.2 L14.1 U7.3(SW)
N16762178: R143.2 R144.1 U7.5(FB)
N16762338: C153.1 U7.8(SS)
N16762406: C145.1 U7.1(BS)
N16762558: C154.1 U7.6(COMP)
N16762594: R142.2 U7.7(EN)
N16786209: J10.1(VCC) U5.7(REGIN) U5.8(VBUS)
N16786264: J10.2(D-) U5.5(D-)
N16786323: J10.3(D+) U5.4(D+)
N16786347: R125.1 U5.9(R\S\T\)
N16786363: C129.1 C130.1 R125.2 U5.6(VDD)
N16786586: LED4.2(CATHODE) R127.2
N16786620: LED3.2(CATHODE) R126.2
N16880171: D23.2(CATHODE) SW1.2 SW1.5
N16880223: D24.2(CATHODE) D25.2(CATHODE) F1.1 SW1.3 SW1.6
N16943156: CON1.37
N16943158: CON1.45
N16943160: CON1.47
N16943192: CON1.43
N16943194: CON1.41
N16943509: CON1.58
N16943511: CON1.56
N16943514: CON1.46
N16943516: CON1.48
N16943518: CON1.36
N16943520: CON1.38
N16943530: CON1.44
N16943532: CON1.42
N16943534: CON1.54
N16944663: CON1.35
N16954113: J9.1 R121.1
N16954115: J9.3 R122.1
N16954117: J9.5 R123.1
N16954119: J9.9 R124.1
N16958016: KEY1.1(P1) R131.1 R133.1
N17041832: LED5.2(CATHODE) R136.2
N17086848: P1.B31(PRSNT4_N) R102.2
N17086955: P1.B17(PRSNT2_N) R101.2
N17086969: C110.1 P1.A17(PERN0)
N17086971: C109.1 P1.A16(PERP0)
N17086973: C115.1 P1.A22(PERN1)
N17086975: C116.1 P1.A21(PERP1)
N17086977: C113.1 P1.A26(PERN2)
N17086979: C114.1 P1.A25(PERP2)
N17086981: C155.1 P1.A30(PERN3)
N17086983: C156.1 P1.A29(PERP3)
N17087016: C112.1 P1.A14(REFCLK-)
N17087018: C111.1 P1.A13(REFCLK+)
N17090580: C71.2 R52.1 U10.44(AVCC33)
N17090685: R58.1 U10.27(EXT_SWG)
N17090814: R54.1 U10.47(DSDA)
N17090816: R53.1 U10.46(DSCL)
N17090818: R56.1 U10.51(HPD)
N17090820: R55.1 U10.52(RSVDL)
N17090980: R57.1 U10.50(CI2CA)
N17097483: R137.2 U13.119(QDCK)
N17097876: C180.1 U13.85(XTALIN) Y4.3
N17097878: C181.1 U13.84(XTALOUT) Y4.1
N17098042: R109.1 R110.2 U14.5(SDA)
N17098052: R147.2 U14.7(WP)
N17098066: R108.1 R146.2 U14.6(SCL)
N17099637: R51.1 U9.7(WP)
N17105083: KEY2.1(P1) R158.1 R159.1
N17109958: C187.1 U2.46(XI) Y2.1
N17109960: C186.1 U2.45(XO) Y2.3
N17113346: R69.2 U2.38(INT_N / PME_N2)
N17113357: R70.2 U2.48(ISET)
N17113998: C189.1 J3.12(LD1_K) R71.2
N17114016: C190.1 C191.1 J3.P1(CT)
N17114022: C188.1 J3.13(LD2_K) R66.2
N17127231: R82.2 U3.38(INT_N / PME_N2)
N17127234: R83.2 U3.48(ISET)
N17127267: C200.1 J4.12(LD1_K) R85.2
N17127285: C199.1 C201.1 J4.P1(CT)
N17127291: C196.1 J4.13(LD2_K) R84.2
N17133722: C220.1 U3.46(XI) Y3.1
N17133724: C219.1 U3.45(XO) Y3.3
N17145811: LED1.2(CATHODE) R135.2
N17145844: LED2.2(CATHODE) R134.2
N17152075: CN1.3 D23.1(ANODE)
N17152103: D24.1(ANODE) J14.1(+12V#1) J14.2(+12V#2) J14.3(+12V#3)
N17240476: LED6.2(CATHODE) R152.2
N17240505: LED7.2(CATHODE) R153.2
N17255447: C144.2 R141.1
N17255454: R139.2 R140.1 U6.5(FB)
N17255460: C135.2 L13.1 U6.3(SW)
N17255510: C137.1 U6.8(SS)
N17255538: C135.1 U6.1(BS)
N17255550: C144.1 U6.6(COMP)
N17255552: R138.2 U6.7(EN)
N17256496: C232.2 R156.1
N17256500: R160.2 R161.1 U8.5(FB)
N17256512: C230.2 L19.1 U8.3(SW)
N17256548: C231.1 U8.8(SS)
N17256590: C230.1 U8.1(BS)
N17256602: C232.1 U8.6(COMP)
N17256604: R157.2 U8.7(EN)
N17291571: C243.2 R162.1
N17291575: R164.2 R165.1 U11.5(FB)
N17291587: C241.2 L20.1 U11.3(SW)
N17291623: C240.1 U11.8(SS)
N17291649: C241.1 U11.1(BS)
N17291677: C243.1 U11.6(COMP)
N17291679: R163.2 U11.7(EN)
